# Allegro board LAY-96101_A.brd
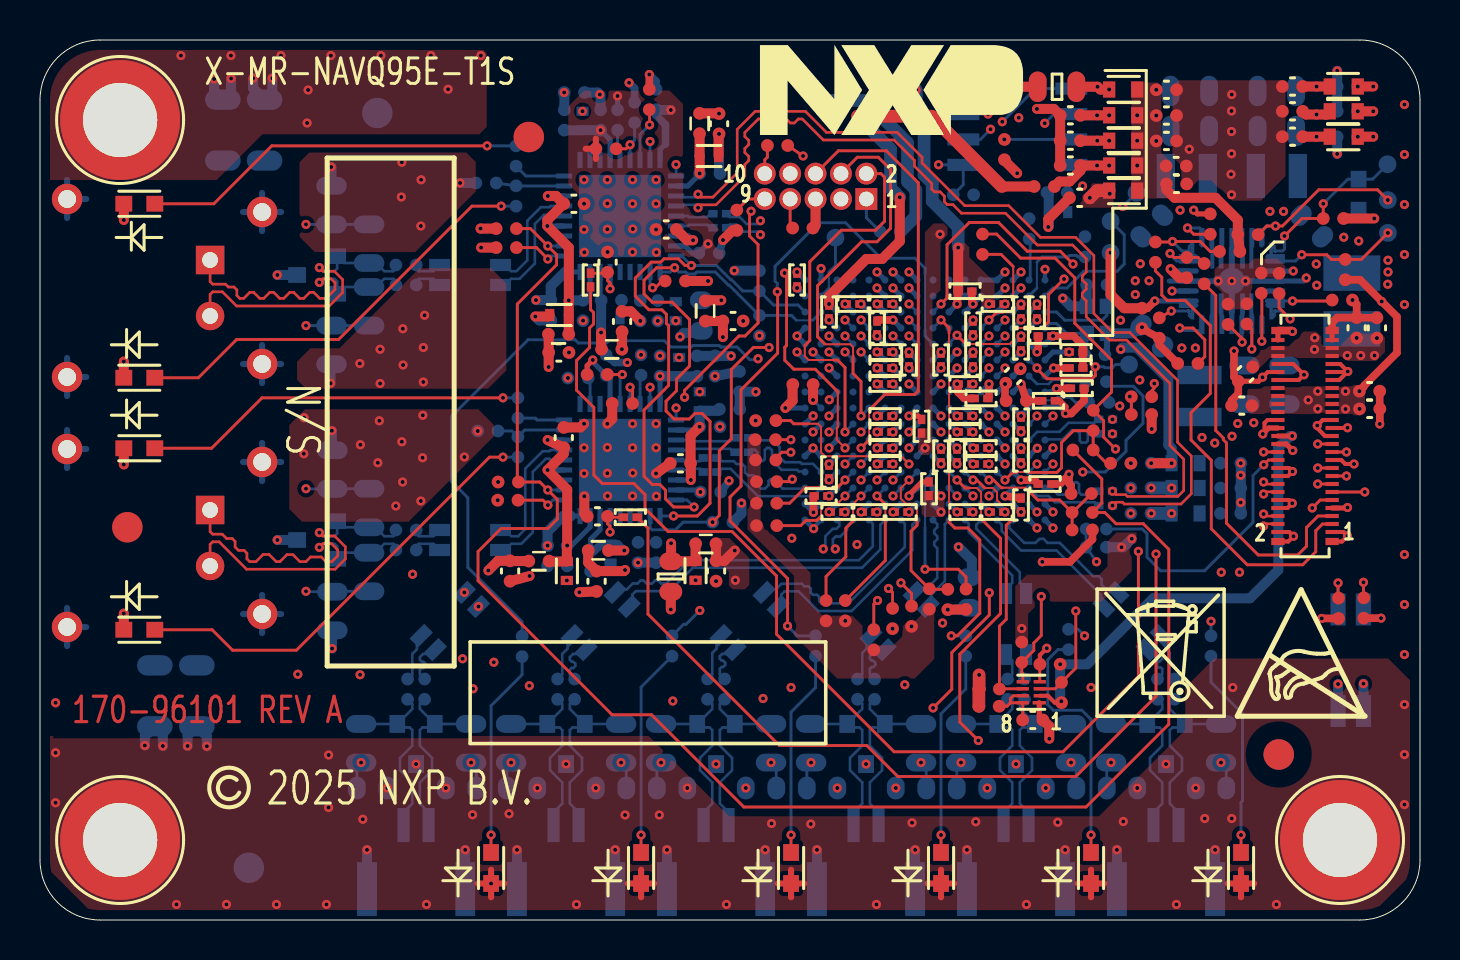
[diagram p0: board, top side]
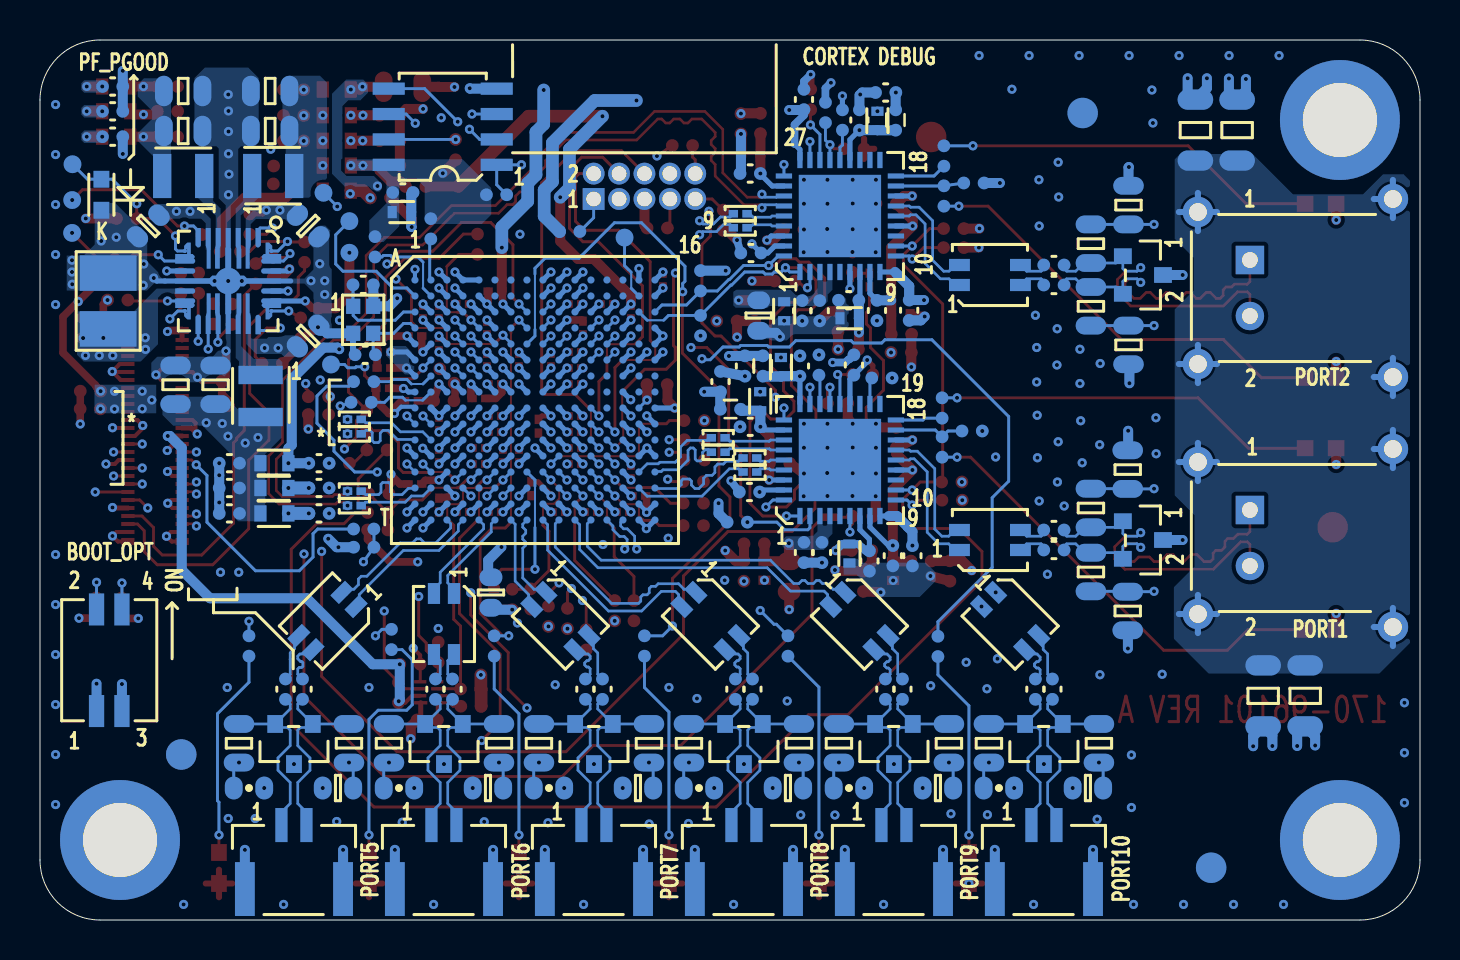
[diagram p1: board, bottom side, seen from below]

Outline 69.01 x 44 mm; copper layers: TOP, L2_GND1, L3_SIG1, L4_SIG2, L5_GND2, BOTTOM. Coordinates in mm from the lower left corner of the outline.
Outline path: 0,41 arc(0.88,43.12) 3,44 66.01,44 arc(68.13,43.12) 69.01,41 69.01,3 arc(68.13,0.88) 66.01,0 3,0 arc(0.88,0.88) 0,3 0,41

## Design rules (mm)
constraint set DEFAULT: min track width 0.145
net group DP1: nets TJA2_TRX_M TJA2_TRX_P
net group DP2: nets TJA2_TRX_CON_M TJA2_TRX_CON_P
net group DP3: nets TJA1_TRX_M TJA1_TRX_P
net group DP4: nets TJA1_TRX_CON_M TJA1_TRX_CON_P
net group DP5: nets SW_100BT1_TRX10_M SW_100BT1_TRX10_P
net group DP6: nets SW_100BT1_TRX9_M SW_100BT1_TRX9_P
net group DP7: nets SW_100BT1_TRX8_M SW_100BT1_TRX8_P
net group DP8: nets SW_100BT1_TRX7_M SW_100BT1_TRX7_P
net group DP9: nets SW_100BT1_TRX6_M SW_100BT1_TRX6_P
net group DP10: nets SW_100BT1_TRX5_M SW_100BT1_TRX5_P
net group DP11: nets N20074265 N20074296
net group DP12: nets N20256327 N20256378
net group ETH1: nets N20229809 N20245926
net group ETH2: nets N20074020 N20074039
net group ETH3: nets N20229760 N20229763
net group ETH4: nets N20064311 N20064322
net group ETH5: nets N20231645 N20231659
net group ETH_RX1: nets ETH_RX1_N ETH_RX1_P
net group ETH_RX2: nets ETH_RX2_N ETH_RX2_P
net group ETH_RX4: nets ETH_RX4_N ETH_RX4_P
net group ETH_TX1: nets ETH_TX1_N ETH_TX1_P
net group ETH_TX2: nets ETH_TX2_N ETH_TX2_P
net group ETH_TX4: nets ETH_TX4_N ETH_TX4_P
net group TRX_CON0: nets TRX_CON0_N TRX_CON0_P
net group TRX_CON0_C: nets TRX_CON0_C_N TRX_CON0_C_P
net group TRX_CON1: nets TRX_CON1_N TRX_CON1_P
net group TRX_CON1_C: nets TRX_CON1_C_N TRX_CON1_C_P
net group TRX_CON2: nets TRX_CON2_N TRX_CON2_P
net group TRX_CON2_C: nets TRX_CON2_C_N TRX_CON2_C_P
net group TRX_CON3: nets TRX_CON3_N TRX_CON3_P
net group TRX_CON3_C: nets TRX_CON3_C_N TRX_CON3_C_P
net group TRX_CON4: nets TRX_CON4_N TRX_CON4_P
net group TRX_CON4_C: nets TRX_CON4_C_N TRX_CON4_C_P
net group TRX_CON5: nets TRX_CON5_N TRX_CON5_P
net group TRX_CON5_C: nets TRX_CON5_C_N TRX_CON5_C_P
net group QSPI: nets QSPI_IO0 QSPI_IO1 QSPI_IO2 QSPI_IO3 QSPI_SCLK QSPI_SS_N
net group SPI: nets SPI4_PCS1 SPI4_PCS2 SPI4_SCK SPI4_SIN SPI4_SOUT

## Placement (name value [footprint] x y rotation side)
BH1  MH3.7_6  [MH236-146P]  4.01 40 0 top
BH2  MH3.7_6  [MH236-146P]  4.01 4 0 top
BH3  MH3.7_6  [MH236-146P]  65.01 4 0 top
C6  0.1uF  [CC0402_25]  49.64 10 0 top
C126  1uF  [CC0402_TOL0P2]  50.92 35.39 180 bottom
C127  0.1uF  [CC0402_25]  50.86 36.38 180 bottom
C134  0.1uF  [CC0402_25]  26.72 41.38 0 bottom
C137  0.1uF  [CC0402_25]  31.01 27.7 90 bottom
C138  1uF  [CC0402_TOL0P2]  32.99 25.94 90 bottom
C139  1uF  [CC0402_TOL0P2]  33.46 38.2 0 top
C140  0.1uF  [CC0402_25]  33.46 33.35 0 bottom
C141  4700pF  [CC0805_OV]  14.62 15.45 270 bottom
C146  0.1uF  [CC0402_25]  34.66 29.95 0 top
C149  0.1uF  [CC0402_25]  62.63 39.16 180 top
C150  1.0UF  [CC0402_25]  65.37 39.16 180 bottom
C151  10uF  [CC0603_OV]  31.54 17.18 270 top
C152  10uF  [CC0603_OV]  33.07 30.23 270 bottom
C153  0.1uF  [CC0402_25]  62.63 41.67 180 top
C154  1.0UF  [CC0402_25]  48.66 27.2 45 top
C155  1uF  [CC0402_TOL0P2]  31.79 30.44 270 bottom
C156  0.01uF  [CC0402_25]  27.87 20.18 180 top
C159  0.1uF  [CC0201]  37.86 32 90 top
C165  1uF  [CC0402_TOL0P2]  28.53 18.32 270 bottom
C167  1uF  [CC0402_TOL0P2]  28.53 30.09 0 bottom
C169  1.0UF  [CC0402_25]  65.37 41.67 180 bottom
C170  0.1uF  [CC0201]  47.87 30.8 0 top
C171  0.1uF  [CC0201]  40.66 30.8 180 top
C172  0.1uF  [CC0201]  46.26 31.44 0 top
C173  1uF  [CC0402_TOL0P2]  32.78 17.46 270 top
C174  0.1uF  [CC0201]  39.46 30.4 270 top
C175  0.1uF  [CC0201]  42.26 30.8 180 top
C176  0.1uF  [CC0201]  51.87 26.59 0 top
C177  0.1uF  [CC0201]  50.26 29.2 0 top
C178  0.1uF  [CC0402_25]  33.81 17.45 270 top
C179  0.1uF  [CC0201]  46.66 29.6 90 top
C180  0.1uF  [CC0201]  42.26 28.4 0 top
C181  0.1uF  [CC0201]  44.08 24.69 90 top
C182  0.1uF  [CC0201]  51.81 28.4 0 top
C183  0.1uF  [CC0201]  41.86 29.6 90 top
C184  0.1uF  [CC0201]  49.06 30.4 270 top
C186  0.1uF  [CC0201]  43.46 28 270 top
C187  0.1uF  [CC0201]  45.06 28 270 top
C188  0.1uF  [CC0201]  46.66 28 270 top
C191  0.1uF  [CC0201]  42.26 27.6 0 top
C192  0.1uF  [CC0201]  42.26 26.8 0 top
C193  0.1uF  [CC0201]  50.43 25.96 0 top
C194  0.1uF  [CC0201]  45.86 23.2 90 top
C195  0.1uF  [CC0201]  46.26 26.8 180 top
C196  0.1uF  [CC0201]  47.06 22.8 0 top
C201  0.1uF  [CC0201]  42.26 25.2 0 top
C202  10uF  [CC0603_OV]  46.46 16.38 270 bottom
C203  0.1uF  [CC0201]  46.26 25.2 180 top
C204  47uF  [CC0805_OV]  50.86 41.66 180 top
C205  0.1uF  [CC0201]  46.26 24.4 180 top
C206  0.1uF  [CC0201]  47.06 23.6 0 top
C207  0.1uF  [CC0201]  39.06 21.2 180 top
C211  0.1uF  [CC0201]  42.26 24.4 0 top
C212  0.1uF  [CC0201]  42.26 23.6 0 top
C213  0.1uF  [CC0201]  50.26 21.8 0 top
C217  0.1uF  [CC0201]  49.86 30.4 270 top
C218  0.1uF  [CC0201]  45.06 23.2 90 top
C219  0.1uF  [CC0201]  49.06 28.8 270 top
C220  0.1uF  [CC0402_25]  56.33 41.51 0 top
C221  0.1uF  [CC0201]  51.81 27.6 0 top
C222  0.1uF  [CC0201]  42.26 22.8 0 top
C223  0.1uF  [CC0201]  39.46 22.4 90 top
C226  0.1uF  [CC0201]  49.06 23.2 270 top
C230  0.1uF  [CC0201]  49.06 20.75 270 top
C231  0.1uF  [CC0201]  47.06 26.08 180 top
C232  0.1uF  [CC0201]  46.26 20.4 180 top
C233  0.1uF  [CC0201]  49.06 24.8 90 top
C234  0.1uF  [CC0201]  41.46 20.4 0 top
C235  0.1uF  [CC0201]  47.86 20.4 180 top
C236  0.1uF  [CC0201]  39.86 20.4 0 top
C237  0.1uF  [CC0201]  44.46 21.56 90 top
C238  0.1uF  [CC0201]  43.06 20.4 0 top
C375  4700pf  [CC0603_OV]  54.11 6.6 0 bottom
C376  0.1uF  [CC0402_25]  56.73 11.54 90 bottom
C378  0.1uF  [CC0402_25]  55.88 11.54 90 bottom
C388  4700pf  [CC0603_OV]  46.61 6.6 0 bottom
C389  0.1uF  [CC0402_25]  49.23 11.54 90 bottom
C392  0.1uF  [CC0402_25]  48.38 11.54 90 bottom
C398  22uF  [CC0805_OV]  57.5 39.45 0 bottom
C399  22uF  [CC0805_OV]  57.5 41.45 0 bottom
C401  4700pf  [CC0603_OV]  39.11 6.6 0 bottom
C402  0.1uF  [CC0402_25]  41.73 11.54 90 bottom
C403  22uF  [CC0805_OV]  60.23 26.76 90 bottom
C404  0.1uF  [CC0402_25]  40.88 11.54 90 bottom
C407  22uF  [CC0805_OV]  61.85 41.45 180 bottom
C408  22uF  [CC0805_OV]  61.85 39.45 180 bottom
C411  22uF  [CC0805_OV]  62.23 26.76 90 bottom
C422  4700pf  [CC0603_OV]  31.61 6.6 0 bottom
C423  0.1uF  [CC0402_25]  28.03 40 90 bottom
C424  0.1uF  [CC0402_25]  33.53 21.4 0 bottom
C425  0.1uF  [CC0402_25]  34.23 11.54 90 bottom
C426  0.1uF  [CC0402_25]  33.38 11.54 90 bottom
C430  1uF  [CC0402_TOL0P2]  27.13 39.96 90 bottom
C431  0.1uF  [CC0402_25]  33.76 27.7 270 bottom
C432  1uF  [CC0402_TOL0P2]  31.96 27.65 90 bottom
C434  0.1uF  [CC0402_25]  31.31 34.52 180 top
C435  0.1uF  [CC0402_25]  32.02 22.83 180 top
C439  1uF  [CC0402_TOL0P2]  25.96 30.25 180 top
C441  1uF  [CC0402_TOL0P2]  26.35 17.45 270 top
C444  0.1uF  [CC0402_25]  26.7 35.81 0 top
C445  0.1uF  [CC0402_25]  26.19 24.12 90 top
C446  0.1uF  [CC0402_25]  18.31 18.5 180 bottom
C447  0.1uF  [CC0402_25]  18.31 19.5 180 bottom
C448  0.1uF  [CC0402_25]  33.49 37.33 0 bottom
C449  0.1uF  [CC0402_25]  33.49 24.66 0 bottom
C450  0.1uF  [CC0402_25]  30.81 41.02 90 bottom
C451  0.1uF  [CC0402_25]  28.31 27.75 90 bottom
C452  8PF  [CC0402_25]  52.85 31.76 180 bottom
C454  0.1uF  [CC0402_25]  30.89 30.46 270 bottom
C455  0.1uF  [CC0402_25]  30.02 30.46 270 bottom
C456  0.01uF  [CC0402_25]  28.38 32.89 90 top
C457  0.1uF  [CC0402_25]  28.57 30.99 0 bottom
C458  0.1uF  [CC0402_25]  27.16 30.48 270 bottom
C459  0.1uF  [CC0402_25]  25.54 30.49 270 bottom
C460  0.1uF  [CC0402_25]  27.53 17.95 270 bottom
C461  0.1uF  [CC0402_25]  26.36 18.21 270 bottom
C462  0.1uF  [CC0402_25]  25.38 18.21 270 bottom
C463  0.1uF  [CC0402_25]  30.81 18.38 270 bottom
C464  0.1uF  [CC0402_25]  29.91 18.38 270 bottom
C466  4700pf  [CC0603_OV]  24.11 6.6 0 bottom
C467  0.1uF  [CC0402_25]  26.73 11.54 90 bottom
C468  8PF  [CC0402_25]  52.74 28.26 0 bottom
C469  0.1uF  [CC0402_25]  25.88 11.54 90 bottom
C470  1.0UF  [CC0402_25]  55.06 22.84 180 bottom
C471  0.1uF  [CC0402_25]  59.54 22.84 0 bottom
C472  0.1uF  [CC0201]  53.29 25.03 180 bottom
C474  0.1uF  [CC0201]  53.29 24.31 180 bottom
C475  4700pf  [CC0603_OV]  16.61 6.6 0 bottom
C477  0.1uF  [CC0402_25]  19.23 11.54 90 bottom
C479  0.1uF  [CC0402_25]  18.38 11.54 90 bottom
C481  0.1uF  [CC0201]  33.51 23.1 0 bottom
C482  0.1uF  [CC0201]  33.51 22.4 0 bottom
C483  1.0UF  [CC0402_25]  51.52 38.97 180 top
C484  1.0UF  [CC0402_25]  51.52 37.73 180 top
C485  1.0UF  [CC0402_25]  51.52 40.23 180 top
C486  1.0UF  [CC0402_25]  55.06 20.33 180 bottom
C487  1.0UF  [CC0402_25]  55.06 21.6 180 bottom
C488  0.1uF  [CC0402_25]  56.33 38.95 0 top
C489  0.1uF  [CC0402_25]  56.33 40.22 0 top
C490  0.1uF  [CC0402_25]  56.81 37.7 0 top
C491  0.1uF  [CC0402_25]  59.54 20.33 0 bottom
C492  0.1uF  [CC0402_25]  59.54 21.6 0 bottom
C493  4.7uF  [CC0603_OV]  63.6 34.7 315 bottom
C494  22uF  [CC1210]  65.6 30.95 90 bottom
C495  4.7uF  [CC0603_OV]  55.6 29.2 135 bottom
C496  4.7uF  [CC0603_OV]  55.6 34.7 225 bottom
C497  0.1uF  [CC0201]  53.29 21.44 180 bottom
C498  0.1uF  [CC0201]  53.29 20.72 180 bottom
C499  0.1uF  [CC0201]  35.09 23.39 0 bottom
C500  0.1uF  [CC0201]  35.09 24.11 0 bottom
C501  0.1uF  [CC0201]  33.99 34.61 0 bottom
C502  0.1uF  [CC0201]  33.99 35.31 0 bottom
C503  0.1uF  [CC0402_25]  18.31 31.75 180 bottom
C504  0.1uF  [CC0402_25]  18.31 32.75 180 bottom
C505  4700pF  [CC0805_OV]  14.58 28.75 270 bottom
C506  0.1uF  [CC0402_25]  34.98 26.92 90 bottom
C507  0.1uF  [CC0402_25]  23.51 17.45 270 top
C508  0.1uF  [CC0402_25]  27.83 16.94 270 top
C509  0.1uF  [CC0402_25]  33.96 39.81 270 top
C510  0.1uF  [CC0402_25]  29.11 29.93 90 top
C511  0.1uF  [CC0402_25]  25.94 28.38 0 top
C512  0.1uF  [CC0201]  27.53 32 270 top
C513  0.1uF  [CC0201]  29.52 20.14 0 top
C514  0.1uF  [CC0402_25]  62.63 40.44 180 top
C515  1.0UF  [CC0402_25]  65.37 40.44 180 bottom
C516  1000pF  [CC1206_OV]  7.84 11.21 270 bottom
C517  1000pF  [CC1206_OV]  9.14 39.49 90 bottom
C521  1uF  [CC0402_25]  66.85 29.6 90 top
C524  0.1uF  [CC0402_25]  65.84 29.61 90 top
C525  1uF  [CC0402_25]  66.49 25.55 0 top
C526  0.1uF  [CC0402_25]  66.48 26.44 0 top
C527  0.1uF  [CC0402_25]  60.28 27.3 225 top
C528  0.1uF  [CC0402_25]  60.09 25.72 180 top
C529  0.1uF  [CC0402_25]  56.83 36.8 0 top
C530  1.0UF  [CC0402_25]  51.99 36.11 180 top
D33  LED_AMB  [LED_0603]  4.97 14.51 180 top
D34  LED_GRN  [LED_0603]  4.97 23.59 180 top
D35  LED_AMB  [LED_0603]  4.97 27.11 180 top
D36  LED_GRN  [LED_0603]  4.97 35.81 180 top
D66  PESD2ETH1G-T  [SOT23_A]  56.31 8.8 0 bottom
D67  LED GREEN  [LED_0603]  60.06 2.6 270 top
D68  PESD2ETH1G-T  [SOT23_A]  48.81 8.8 0 bottom
D69  LED GREEN  [LED_0603]  52.56 2.6 270 top
D70  PESD2ETH1G-T  [SOT23_A]  41.31 8.8 0 bottom
D71  LED GREEN  [LED_0603]  45.06 2.6 270 top
D72  PESD2ETH1G-T  [SOT23_A]  33.81 8.8 0 bottom
D73  LED GREEN  [LED_0603]  37.56 2.6 270 top
D74  PESD2ETH1G-T  [SOT23_A]  26.31 8.8 0 bottom
D75  LED GREEN  [LED_0603]  30.06 2.6 270 top
D76  PESD2ETH1G-T  [SOT23_A]  18.81 8.8 0 bottom
D77  LED GREEN  [LED_0603]  22.56 2.6 270 top
D79  LED_GRN  [LED_0603]  65.94 36.27 270 bottom
J26  SM02B-GHS-TB(LF)(SN)  [CON_1X2_1P25_5P8X4P1_SM_RA]  56.31 2.5 180 bottom
J27  SM02B-GHS-TB(LF)(SN)  [CON_1X2_1P25_5P8X4P1_SM_RA]  48.81 2.5 180 bottom
J28  SM02B-GHS-TB(LF)(SN)  [CON_1X2_1P25_5P8X4P1_SM_RA]  41.31 2.5 180 bottom
J29  SM02B-GHS-TB(LF)(SN)  [CON_1X2_1P25_5P8X4P1_SM_RA]  33.81 2.5 180 bottom
J30  SM02B-GHS-TB(LF)(SN)  [CON_1X2_1P25_5P8X4P1_SM_RA]  26.31 2.5 180 bottom
J31  SM02B-GHS-TB(LF)(SN)  [CON_1X2_1P25_5P8X4P1_SM_RA]  18.81 2.5 180 bottom
J32  CON JACK  [CON2_2P8_JACK_TH]  8.51 20.5 90 bottom
J33  CON PLUG 2X25  [CON50_0P4_11P72X2P05_SM_A]  63.26 24.2 90 top
J35  CON JACK  [CON2_2P8_JACK_TH]  8.51 33 90 bottom
J37  SHF-105-01-L-D-RA  [CON2X5_50_TH_RA]  41.32 36.05 180 bottom
L13  120  [IND_0402]  32.98 39.83 270 top
L14  120  [IND_0402]  33.27 30.45 90 top
L15  120  [IND_0402]  34.48 25.54 180 bottom
L16  330 OHM  [IND_1608]  65.19 39.16 0 top
L17  330 OHM  [IND_1608]  65.19 41.67 0 top
L18  120  [IND_0402]  27.92 18.48 0 top
L19  120  [IND_0402]  28.59 28.54 180 top
L21  120  [IND_0402]  33.29 18.81 180 top
L23  330 OHM  [IND_1608]  54.16 41.52 180 top
L35  200uH @ 100KHz  [IND_ACT1210_SM]  54.63 14.95 315 bottom
L37  200uH @ 100KHz  [IND_ACT1210_SM]  48.81 14.8 270 bottom
L39  200uH @ 100KHz  [IND_ACT1210_SM]  42.98 14.95 225 bottom
L40  200uH @ 100KHz  [IND_ACT1210_SM]  35.48 14.95 225 bottom
L41  120  [IND_0402]  26.22 40 90 bottom
L42  120  [IND_0402]  32.86 27.7 90 bottom
L44  120  [IND_0402]  25.93 29.29 180 top
L45  DLW32MH101XT2  [IND_3P4X2P7_SMT]  21.51 19 180 bottom
L46  120  [IND_0402]  24.95 17.95 180 top
L47  200uH @ 100KHz  [IND_ACT1210_SM]  28.03 14.95 225 bottom
L48  330 OHM  [IND_1608]  57.29 22.84 180 bottom
L49  200uH @ 100KHz  [IND_ACT1210_SM]  20.49 14.95 225 bottom
L50  330 OHM  [IND_1608]  54.16 38.97 180 top
L51  330 OHM  [IND_1608]  54.16 37.73 180 top
L52  330 OHM  [IND_1608]  54.16 40.23 180 top
L53  330 OHM  [IND_1608]  57.29 20.33 180 bottom
L54  330 OHM  [IND_1608]  57.29 21.6 180 bottom
L55  DLW32MH101XT2  [IND_3P4X2P7_SMT]  21.51 32.25 180 bottom
L56  330 OHM  [IND_1608]  65.19 40.44 0 top
L57  330 OHM  [IND_1608]  54.16 36.47 180 top
LBK1  0.47 uH  [IND2520]  57.35 37.2 180 bottom
LBK2  0.47 uH  [IND2520]  57.98 26.2 270 bottom
LBK3  0.47 uH  [IND2520]  61.85 37.2 0 bottom
NOREF  -  []  47.46 13.1 0 top
NOREF#2  -  []  57.35 29.7 0 top
NOREF#3  -  []  61.85 29.7 90 top
NOREF#4  -  []  23.85 1.55 0 top
NOREF#5  -  []  36.01 39.25 0 top
NOREF#6  -  []  32.64 25.34 90 top
NOREF#7  -  []  50.16 13.1 90 top
NOREF#8  -  []  38.26 20 90 top
NOREF#9  -  []  56.06 14.22 90 top
NOREF#10  -  []  50.44 35.39 0 top
NOREF#11  -  []  61.9 19.4 90 top
NOREF#12  -  []  58.02 32.61 0 top
NOREF#13  -  []  52.35 29.34 0 top
NOREF#14  -  []  9.45 6.6 0 top
NOREF#15  -  []  31.96 27.18 90 top
NOREF#16  -  []  28.53 17.85 90 top
NOREF#17  -  []  56.83 24.8 0 top
NOREF#18  -  []  32.98 38.2 0 top
NOREF#19  -  []  36.24 36.05 0 top
NOREF#20  -  []  8.51 17.7 90 top
NOREF#21  -  []  57.95 31.53 0 top
NOREF#22  -  []  57.43 30.45 0 top
NOREF#23  -  []  26.35 16.98 90 top
NOREF#24  -  []  26 16.85 90 top
NOREF#25  -  []  28.06 30.09 0 top
NOREF#26  -  []  38.26 20 0 top
NOREF#27  -  [unnamed#2]  4.37 19.64 0 top
NOREF#28  -  []  33.32 14.7 0 top
NOREF#29  -  []  49.07 12.06 0 top
NOREF#30  -  []  49.14 11.91 0 top
NOREF#31  -  []  -3.64 35.1 0 top
NOREF#32  -  []  30.91 0.45 90 top
NOREF#33  -  []  8.51 20.5 90 top
NOREF#34  -  []  27.78 12.79 90 top
NOREF#35  -  []  31.61 28.25 0 top
NOREF#36  -  []  30.91 0.45 0 top
NOREF#37  -  []  57.99 32.1 0 top
NOREF#38  -  []  38.85 1.55 0 top
NOREF#39  -  []  25.87 14.7 0 top
NOREF#40  -  []  26.78 39.36 90 top
NOREF#41  -  []  53.35 29.34 90 top
NOREF#42  -  []  23.41 0.45 0 top
NOREF#43  -  []  61.76 30.45 90 top
NOREF#44  -  []  32.43 16.86 0 top
NOREF#45  -  []  38.41 0.45 0 top
NOREF#46  -  []  -3.64 22.6 0 top
NOREF#47  -  []  57.95 32.37 0 top
NOREF#48  -  []  26.78 40.56 0 top
NOREF#49  -  []  11.11 27.8 90 top
NOREF#50  -  []  6.87 40.9 0 top
NOREF#51  -  []  22.71 30.7 0 top
NOREF#52  -  []  31.35 1.55 0 top
NOREF#53  -  []  50.32 35.05 90 top
NOREF#54  -  []  58.1 29.77 90 top
NOREF#55  -  []  35.23 12.79 90 top
NOREF#56  -  []  53.41 0.45 0 top
NOREF#57  -  []  19.98 31.75 0 top
NOREF#58  -  []  58.02 31.3 0 top
NOREF#59  -  []  39.29 8.82 0 top
NOREF#60  -  []  58 30.88 0 top
NOREF#61  -  []  24.96 34.1 0 top
NOREF#62  -  []  55.36 13.52 0 top
NOREF#63  -  []  27.93 30.44 0 top
NOREF#64  -  []  58.1 29.77 90 top
NOREF#65  -  []  28.88 17.73 90 top
NOREF#66  -  []  1.36 27.15 90 top
NOREF#67  -  [unnamed#2]  61.94 8.28 0 top
NOREF#68  -  []  59.6 31.95 0 top
NOREF#69  -  []  8.51 20.5 90 top
NOREF#70  -  []  38.41 0.45 90 top
NOREF#71  -  []  26 16.85 0 top
NOREF#72  -  []  4.01 4 0 top
NOREF#73  -  []  20.25 12.79 90 top
NOREF#74  -  []  59.6 31.95 0 top
NOREF#75  -  []  -3.64 28.1 90 top
NOREF#76  -  []  57.99 31.8 0 top
NOREF#77  -  []  53.7 28.96 90 top
NOREF#78  -  []  8.51 33 90 top
NOREF#79  -  []  32.37 38.54 90 top
NOREF#80  -  []  32.43 16.86 90 top
NOREF#81  -  []  49.14 10.86 0 top
NOREF#82  -  []  54.88 12.79 0 top
NOREF#83  -  []  48.31 13.27 0 top
NOREF#84  -  []  34.06 37.85 90 top
NOREF#85  -  []  6.87 4.9 0 top
NOREF#86  -  []  8.51 30.2 90 top
NOREF#87  -  []  1.36 14.65 90 top
NOREF#88  -  []  29.13 29.74 90 top
NOREF#89  -  []  67.87 4.9 0 top
NOREF#90  -  []  37.26 19 0 top
NOREF#91  -  []  61.1 29.79 90 top
NOREF#92  -  []  41.55 14.22 0 top
NOREF#93  -  []  -441.94 233.39 0 top
NOREF#94  -  []  19.98 31.75 90 top
NOREF#95  -  []  60.8 37.2 0 top
NOREF#96  -  []  25.36 29.9 90 top
NOREF#97  -  []  60.45 38.35 0 top
NOREF#98  -  []  32.14 29.84 90 top
NOREF#99  -  []  45.91 0.45 0 top
NOREF#100  -  []  16.35 1.55 0 top
NOREF#101  -  []  38.26 20 0 top
NOREF#102  -  []  63.34 10.14 90 top
NOREF#103  -  []  37.26 19 90 top
NOREF#104  -  []  31.79 29.96 90 top
NOREF#105  -  [unnamed#2]  24.44 39.15 0 top
NOREF#106  -  []  63.34 15.84 0 top
NOREF#107  -  []  34.05 14.22 0 top
NOREF#108  -  []  27.13 39.49 90 top
NOREF#109  -  []  63.25 36.05 90 top
NOREF#110  -  []  19.77 13.52 90 top
NOREF#111  -  []  -45.58 -91.35 0 top
NOREF#112  -  []  38.26 20 90 top
NOREF#113  -  []  27.31 13.52 90 top
NOREF#114  -  []  50.32 35.05 0 top
NOREF#115  -  []  21.51 8.82 0 top
NOREF#116  -  []  57.39 0 90 top
NOREF#117  -  []  36.24 37.32 90 top
NOREF#118  -  []  25.49 30.25 0 top
NOREF#119  -  []  34.76 13.52 90 top
NOREF#120  -  []  19.06 14.22 0 top
NOREF#121  -  []  52 28.96 0 top
NOREF#122  -  []  56.3 37.2 0 top
NOREF#123  -  []  32.99 25.46 90 top
NOREF#124  -  []  32.64 26.54 0 top
NOREF#125  -  []  55.95 36.05 90 top
NOREF#126  -  []  31.44 29.84 0 top
NOREF#127  -  []  53.41 0.45 90 top
NOREF#128  -  []  11.11 15.3 90 top
NOREF#129  -  []  64.28 18.34 90 top
NOREF#130  -  []  15.91 0.45 0 top
NOREF#131  -  []  26.6 14.22 0 top
NOREF#132  -  []  57.98 25.15 90 top
NOREF#133  -  []  31.61 27.05 90 top
NOREF#134  -  []  42.26 13.52 90 top
NOREF#135  -  []  40.05 36.05 0 top
NOREF#136  -  []  8.51 33 90 top
NOREF#137  -  []  32.37 38.54 0 top
NOREF#138  -  []  56.95 32.83 0 top
NOREF#139  -  []  32.78 16.99 90 top
NOREF#140  -  []  28.18 17.73 0 top
NOREF#141  -  []  61.9 29.48 0 top
NOREF#142  -  []  15.91 0.45 90 top
NOREF#143  -  []  55.95 36.05 0 top
NOREF#144  -  []  19.98 18.5 90 top
NOREF#145  -  []  49.31 13.27 90 top
NOREF#146  -  []  62.23 30.06 0 top
NOREF#147  -  []  56.95 31.07 0 top
NOREF#148  -  []  19.98 18.5 0 top
NOREF#149  -  []  0 24.53 0 top
NOREF#150  -  []  23.41 0.45 90 top
NOREF#151  -  []  45.91 0.45 90 top
NOREF#152  -  []  52.86 10.19 0 top
NOREF#153  -  []  59.88 10.19 0 top
NOREF#154  -  []  32.86 37.85 0 top
NOREF#155  -  []  18.34 14.7 0 top
NOREF#156  -  []  19.81 17.65 0 top
NOREF#157  -  []  -3.64 15.6 90 top
NOREF#158  -  []  19.81 17.65 90 top
NOREF#159  -  []  -467.22 -286.29 0 top
NOREF#160  -  []  64.91 10.45 0 top
NOREF#161  -  []  53.85 1.55 0 top
NOREF#162  -  []  20.71 12.7 90 top
NOREF#163  -  []  49.14 11.56 90 top
NOREF#164  -  []  25.36 30.6 0 top
NOREF#165  -  []  56.79 14.7 90 top
NOREF#166  -  []  49.07 10.71 90 top
NOREF#167  -  []  58 33.02 0 top
NOREF#168  -  []  40.82 14.7 0 top
NOREF#169  -  []  42.73 12.79 90 top
NOREF#170  -  []  59.13 24.8 90 top
NOREF#171  -  []  46.35 1.55 0 top
NOREF#172  -  [unnamed#2]  10.44 2.61 180 bottom
NOREF#173  -  [unnamed#2]  61.94 8.28 180 bottom
NOREF#174  -  [unnamed#2]  16.87 40.35 180 bottom
R5  200K  [RC0402_25]  47.46 10.69 0 top
R93  100K  [RC0402_25]  55.1 30.08 270 top
R160  100K  [RC0402_25]  55.97 29.6 270 top
R170  4.7K  [RC0402_25]  48.23 38.52 90 top
R171  1.2K  [RC0402_25]  64.68 35.08 180 top
R173  4.7K  [RC0402_25]  46.18 36.26 180 bottom
R184  100 K  [RC0805_OV]  14.62 22.52 90 bottom
R186  1.0K  [RC0805_OV]  16.46 20.6 90 bottom
R187  1.0K  [RC0805_OV]  16.46 17.4 270 bottom
R191  10K  [RC0402_25]  52.82 18.64 180 bottom
R193  10K  [RC0402_25]  49.46 34.56 270 bottom
R194  10K  [RC0402_25]  52.25 33.66 270 bottom
R195  10K  [RC0402_25]  55.08 25.27 180 top
R200  10K  [RC0402_25]  34.14 19.89 180 bottom
R208  6.49K  [RC0402_25]  38.15 26.77 180 top
R209  10K  [RC0402_25]  46.31 16.04 270 top
R211  0  [RC0402_25]  48.82 25.96 180 top
R213  10K  [RC0402_25]  36.34 21.92 0 top
R215  10K  [RC0402_25]  36.34 20.84 0 top
R216  10K  [RC0402_25]  42.63 15.07 270 top
R218  10K  [RC0402_25]  36.28 24.02 0 top
R220  10K  [RC0402_25]  36.34 19.72 0 top
R222  10K  [RC0402_25]  36.29 23 0 top
R223  10K  [RC0402_25]  39.31 15.46 90 top
R224  10K  [RC0402_25]  40.27 15.46 90 top
R225  10K  [RC0402_25]  41.69 14.01 90 top
R226  10K  [RC0402_25]  43.58 15.19 90 top
R227  10K  [RC0402_25]  45.39 16.02 270 top
R228  10K  [RC0402_25]  36.29 24.97 180 top
R229  4.7K  [RC0402_25]  66.19 15.6 270 top
R230  4.7K  [RC0402_25]  64.93 15.59 270 top
R231  680  [RC0402_25]  23.9 23.65 270 bottom
R232  680  [RC0402_25]  23.9 25.6 90 bottom
R233  680  [RC0402_25]  23.81 36.2 270 bottom
R234  680  [RC0402_25]  23.81 38.2 90 bottom
R454  1.0K  [RC0805_OV]  59.06 8.84 270 bottom
R459  100K  [RC0603_OV]  58.56 6.6 180 bottom
R462  1.0K  [RC0805_OV]  53.56 8.84 270 bottom
R464  240  [RC0402_25]  58.56 13.7 270 bottom
R465  1.0K  [RC0805_OV]  51.56 8.84 270 bottom
R466  100K  [RC0603_OV]  51.06 6.6 180 bottom
R470  1.0K  [RC0805_OV]  46.06 8.84 270 bottom
R473  240  [RC0402_25]  51.43 14.03 270 bottom
R481  1.0K  [RC0805_OV]  44.06 8.84 270 bottom
R489  100K  [RC0603_OV]  43.56 6.6 180 bottom
R490  1.0K  [RC0805_OV]  38.56 8.84 270 bottom
R493  240  [RC0402_25]  46.29 13.7 270 bottom
R501  1.0K  [RC0805_OV]  36.56 8.84 270 bottom
R504  10K  [RC0402_25]  30.47 41.02 90 top
R505  10K  [RC0402_25]  29.73 40.38 90 bottom
R506  10K  [RC0402_25]  28.31 38.56 0 top
R507  10K  [RC0402_25]  28.88 40 90 bottom
R508  10K  [RC0402_25]  30.06 27.75 90 bottom
R509  10K  [RC0402_25]  29.12 25.83 180 top
R511  10K  [RC0402_25]  27.87 27.27 180 top
R512  10K  [RC0402_25]  26.91 27.1 180 bottom
R515  100K  [RC0603_OV]  36.06 6.6 180 bottom
R517  1.0K  [RC0805_OV]  31.06 8.84 270 bottom
R518  10K  [RC0402_25]  22.31 36.85 180 bottom
R519  10K  [RC0402_25]  22.4 24.45 180 bottom
R520  240  [RC0402_25]  38.78 13.7 270 bottom
R531  10K  [RC0402_25]  31.77 31.95 180 top
R532  1.0K  [RC0805_OV]  29.06 8.84 270 bottom
R535  100K  [RC0603_OV]  28.56 6.6 180 bottom
R536  1.0K  [RC0805_OV]  23.56 8.84 270 bottom
R537  240  [RC0402_25]  31.61 13.7 270 bottom
R538  1.0K  [RC0805_OV]  21.56 8.84 270 bottom
R539  100K  [RC0603_OV]  21.06 6.6 180 bottom
R540  1.0K  [RC0805_OV]  16.06 8.84 270 bottom
R541  240  [RC0402_25]  24.11 13.68 270 bottom
R545  10K  [RC0402_25]  23.42 21.9 180 top
R546  10K  [RC0402_25]  23.32 34.57 180 top
R547  10K  [RC0402_25]  23.32 33.62 0 top
R548  10K  [RC0402_25]  23.4 20.99 0 top
R549  0  [RC0402_25]  52.12 20.38 0 top
R550  10K  [RC0402_25]  52.07 21.32 180 top
R551  0  [RC0402_25]  52.16 23.5 0 top
R552  0  [RC0402_25]  52.67 24.98 270 top
R553  10K  [RC0402_25]  54.04 22.84 0 top
R554  10K  [RC0402_25]  52.12 19.5 180 top
R555  10K  [RC0402_25]  44.47 16.05 90 top
R558  100  [RC0402_25]  42.52 34.42 180 bottom
R559  1.0K  [RC0805_OV]  16.46 30.68 270 bottom
R560  1.0K  [RC0805_OV]  16.46 33.82 90 bottom
R561  100 K  [RC0805_OV]  14.58 35.75 90 bottom
R562  0  [RC0402_25]  52.82 19.55 180 bottom
R563  0  [RC0402_25]  55.08 26.16 180 top
R564  5.1K  [RC0402_25]  60.41 34.27 0 top
R565  100K  [RC0402_25]  65.27 32.52 90 top
R566  5.1K  [RC0402_25]  58.52 34.8 270 top
R567  0  [RC0402_25]  65.12 31 180 top
R568  0  [RC0402_25]  60.35 30.3 90 top
R569  0  [RC0402_25]  59.41 30.29 270 top
R571  0  [RC0402_25]  58.21 32.31 270 top
R572  0  [RC0402_25]  55.78 33.39 270 top
R573  1.5K  [RC0402_25]  35.98 31.96 270 bottom
R574  1.5K  [RC0402_25]  35.98 29.72 90 bottom
R577  0  [RC0402_25]  38.14 34.6 0 top
R578  0  [RC0402_25]  34.84 34.99 270 top
R579  0  [RC0402_25]  36.88 38.73 180 top
R580  0  [RC0402_25]  47.13 33.79 90 top
R581  2.21k  [RC0402_25]  59.49 33.42 180 top
R582  2.21k  [RC0402_25]  57.35 32.62 90 top
R584  0  [RC0402_25]  61.96 31.83 270 top
R585  0  [RC0402_25]  61.07 31.84 270 top
R586  0  [RC0402_25]  57.4 27.83 0 top
R587  0  [RC0402_25]  52.82 26.92 180 bottom
R588  0  [RC0402_25]  52.94 25.88 180 bottom
R589  0  [RC0402_25]  50.22 36.67 180 top
R590  1M  [RC1206_OV]  5.74 11.21 270 bottom
R591  1M  [RC1206_OV]  11.23 39.49 90 bottom
R593  1.5K  [RC0402_25]  47.47 11.55 0 top
R594  1.5K  [RC0402_25]  49.09 13.39 270 top
R595  1.5K  [RC0402_25]  50.51 12.79 180 top
R596  1.5K  [RC0402_25]  51.08 11.38 90 top
S1  CHS-02TA  [SW4_DIP_1P27_4P4X5P7]  65.54 12.99 90 bottom
TP21  TP_35MIL  [TESTPOINT_35MIL]  39.78 34.12 180 bottom
TP22  TP_35MIL  [TESTPOINT_35MIL]  54.46 27.77 180 bottom
TP245  TP_35MIL  [TESTPOINT_35MIL]  53.53 33.36 270 bottom
TP248  TP_35MIL  [TESTPOINT_35MIL]  54.83 36.36 180 bottom
TP249  TP_35MIL  [TESTPOINT_35MIL]  67.4 36 270 bottom
TP250  TP_35MIL  [TESTPOINT_35MIL]  67.4 34.36 270 bottom
TP251  TP_35MIL  [TESTPOINT_35MIL]  53.54 34.94 180 bottom
TP252  TP_35MIL  [TESTPOINT_35MIL]  67.38 37.79 270 bottom
U53  IS25LP080D-JNLE  [SO8_1P27_4X5]  48.87 39.66 0 bottom
U54  TJA1120BHN  [QFN36_0P5_6X6]  29.01 35.2 90 bottom
U55  TJA1120BHN  [QFN36_0P5_6X6]  29.01 23 90 bottom
U57  PESD2ETH1G-T  [SOT23_A]  13.86 19 270 bottom
U58  SJA1110AEL  [BGA256_0P8_14X14MM_059H]  44.26 26 180 bottom
U63  PPF5103AMMAFES  [SOT2089-1_FCQFN28_0P5_4P5SQ]  59.6 31.95 270 bottom
U64  PESD2ETH1G-T  [SOT23_A]  13.86 32.25 270 bottom
U65  PCA9306JK  [X2SON8_0P35_1X1P35MM]  49.57 11.39 180 top
X1  25MHz  [XTL4_2P1X1P7MM_SM]  52.85 30.01 270 bottom

## Library data of the parts
BH1-BH3 = MOUNT_HOLE
C6 C126 C127 C134 C137-C141 C146 C150-C152 C154-C156 C165 C167 C169 C173 C178 C202 C204 C375 C376 C378 C388 C389 C392 C398 C399 C401-C404 C407 C408 C411 C422-C426 C430-C432 C434 C435 C439 C441 C444-C452 C454-C464 C466-C470 C475 C477 C479 C483-C487 C493-C496 C503-C511 C515-C517 C521 C525 C530 = CAP_NP
C149 C153 C220 C471 C488-C492 C514 C524 C526-C529 = CAP_NP: tolerance: 10%
C159 C170-C172 C174-C177 C179-C184 C186-C188 C191-C196 C201 C203 C205-C207 C211-C213 C217-C219 C221-C223 C226 C230-C238 C472 C474 C497-C500 = CAP_NP: Tolerance: TOLERANCE; User Part Number: 150-80124
C481 C482 C501 C502 C512 C513 = CAP_NP: Tolerance: TOLERANCE; User Part Number: 150-80340
D33-D36 D67 D69 D71 D73 D75 D77 D79 = LED
D66 D68 D70 D72 D74 D76 U57 U64 = ESD_DIODE_2LINE
J26-J31 = CONN_2X1_SH
J32 J35 = CONN_JACK_2P_4SH
J33 = HDR_2X25_4S
J37 = CONN_HDR_5X2
L13-L15 L18 L19 L21 L41 L42 L44 L46 = INDUCTOR_FERRITE
L16 L17 L23 L48 L50-L54 L56 L57 = BEAD
L35 L37 L39 L40 L47 L49 = FILTER_4P
L45 L55 = DLW43
LBK1-LBK3 = INDUCTOR
R5 R93 R160 R170 R171 R173 R191 R193-R195 R200 R208 R209 R211 R213 R215 R216 R218 R220 R222-R234 R454 R459 R462 R464-R466 R470 R473 R481 R489 R490 R493 R501 R504-R509 R511 R512 R515 R517-R520 R531 R532 R535-R541 R545-R555 R558 R562-R569 R571-R574 R577-R582 R584-R591 R593-R596 = RES
R184 R186 R187 R559-R561 = RES: tolerance: 1%
S1 = CHS-02TA_SW
TP21 TP22 TP245 TP248-TP252 = T POINT R: Tolerance: TOLERANCE; User Part Number: 510-75618
U53 = 25WP_8P
U54 U55 = TJA1120BHN_HVQFN36P
U58 = SJA1110_BGA256_B
U63 = PF5103_QFN28
U65 = PCA9306_TSSOP8
X1 = XTAL_13

## Footprints (pads in the part's own frame, mm; a bottom-side part is the same pattern mirrored in y, then rotated)
BGA256_0P8_14X14MM_059H
  round 0.356 smd: A1(-6,6) A2(-5.2,6) A3(-4.4,6) A4(-3.6,6) A5(-2.8,6) A6(-2,6) A7(-1.2,6) A8(-0.4,6) A9(0.4,6) A10(1.2,6) A11(2,6) A12(2.8,6) A13(3.6,6) A14(4.4,6) A15(5.2,6) A16(6,6) B1(-6,5.2) B2(-5.2,5.2) B3(-4.4,5.2) B4(-3.6,5.2) B5(-2.8,5.2) B6(-2,5.2) B7(-1.2,5.2) B8(-0.4,5.2) B9(0.4,5.2) B10(1.2,5.2) B11(2,5.2) B12(2.8,5.2) B13(3.6,5.2) B14(4.4,5.2) B15(5.2,5.2) B16(6,5.2) C1(-6,4.4) C2(-5.2,4.4) C3(-4.4,4.4) C4(-3.6,4.4) C5(-2.8,4.4) C6(-2,4.4) C7(-1.2,4.4) C8(-0.4,4.4) C9(0.4,4.4) C10(1.2,4.4) C11(2,4.4) C12(2.8,4.4) C13(3.6,4.4) C14(4.4,4.4) C15(5.2,4.4) C16(6,4.4) D1(-6,3.6) D2(-5.2,3.6) D3(-4.4,3.6) D4(-3.6,3.6) D5(-2.8,3.6) D6(-2,3.6) D7(-1.2,3.6) D8(-0.4,3.6) D9(0.4,3.6) D10(1.2,3.6) D11(2,3.6) D12(2.8,3.6) D13(3.6,3.6) D14(4.4,3.6) D15(5.2,3.6) D16(6,3.6) E1(-6,2.8) E2(-5.2,2.8) E3(-4.4,2.8) E4(-3.6,2.8) E5(-2.8,2.8) E6(-2,2.8) E7(-1.2,2.8) E8(-0.4,2.8) E9(0.4,2.8) E10(1.2,2.8) E11(2,2.8) E12(2.8,2.8) E13(3.6,2.8) E14(4.4,2.8) E15(5.2,2.8) E16(6,2.8) F1(-6,2) F2(-5.2,2) F3(-4.4,2) F4(-3.6,2) F5(-2.8,2) F6(-2,2) F7(-1.2,2) F8(-0.4,2) F9(0.4,2) F10(1.2,2) F11(2,2) F12(2.8,2) F13(3.6,2) F14(4.4,2) F15(5.2,2) F16(6,2) G1(-6,1.2) G2(-5.2,1.2) G3(-4.4,1.2) G4(-3.6,1.2) G5(-2.8,1.2) G6(-2,1.2) G7(-1.2,1.2) G8(-0.4,1.2) G9(0.4,1.2) G10(1.2,1.2) G11(2,1.2) G12(2.8,1.2) G13(3.6,1.2) G14(4.4,1.2) G15(5.2,1.2) G16(6,1.2) H1(-6,0.4) H2(-5.2,0.4) H3(-4.4,0.4) H4(-3.6,0.4) H5(-2.8,0.4) H6(-2,0.4) H7(-1.2,0.4) H8(-0.4,0.4) H9(0.4,0.4) H10(1.2,0.4) H11(2,0.4) H12(2.8,0.4) H13(3.6,0.4) H14(4.4,0.4) H15(5.2,0.4) H16(6,0.4) J1(-6,-0.4) J2(-5.2,-0.4) J3(-4.4,-0.4) J4(-3.6,-0.4) J5(-2.8,-0.4) J6(-2,-0.4) J7(-1.2,-0.4) J8(-0.4,-0.4) J9(0.4,-0.4) J10(1.2,-0.4) J11(2,-0.4) J12(2.8,-0.4) J13(3.6,-0.4) J14(4.4,-0.4) J15(5.2,-0.4) J16(6,-0.4) K1(-6,-1.2) K2(-5.2,-1.2) K3(-4.4,-1.2) K4(-3.6,-1.2) K5(-2.8,-1.2) K6(-2,-1.2) K7(-1.2,-1.2) K8(-0.4,-1.2) K9(0.4,-1.2) K10(1.2,-1.2) K11(2,-1.2) K12(2.8,-1.2) K13(3.6,-1.2) K14(4.4,-1.2) K15(5.2,-1.2) K16(6,-1.2) L1(-6,-2) L2(-5.2,-2) L3(-4.4,-2) L4(-3.6,-2) L5(-2.8,-2) L6(-2,-2) L7(-1.2,-2) L8(-0.4,-2) L9(0.4,-2) L10(1.2,-2) L11(2,-2) L12(2.8,-2) L13(3.6,-2) L14(4.4,-2) L15(5.2,-2) L16(6,-2) M1(-6,-2.8) M2(-5.2,-2.8) M3(-4.4,-2.8) M4(-3.6,-2.8) M5(-2.8,-2.8) M6(-2,-2.8) M7(-1.2,-2.8) M8(-0.4,-2.8) M9(0.4,-2.8) M10(1.2,-2.8) M11(2,-2.8) M12(2.8,-2.8) M13(3.6,-2.8) M14(4.4,-2.8) M15(5.2,-2.8) M16(6,-2.8) N1(-6,-3.6) N2(-5.2,-3.6) N3(-4.4,-3.6) N4(-3.6,-3.6) N5(-2.8,-3.6) N6(-2,-3.6) N7(-1.2,-3.6) N8(-0.4,-3.6) N9(0.4,-3.6) N10(1.2,-3.6) N11(2,-3.6) N12(2.8,-3.6) N13(3.6,-3.6) N14(4.4,-3.6) N15(5.2,-3.6) N16(6,-3.6) P1(-6,-4.4) P2(-5.2,-4.4) P3(-4.4,-4.4) P4(-3.6,-4.4) P5(-2.8,-4.4) P6(-2,-4.4) P7(-1.2,-4.4) P8(-0.4,-4.4) P9(0.4,-4.4) P10(1.2,-4.4) P11(2,-4.4) P12(2.8,-4.4) P13(3.6,-4.4) P14(4.4,-4.4) P15(5.2,-4.4) P16(6,-4.4) R1(-6,-5.2) R2(-5.2,-5.2) R3(-4.4,-5.2) R4(-3.6,-5.2) R5(-2.8,-5.2) R6(-2,-5.2) R7(-1.2,-5.2) R8(-0.4,-5.2) R9(0.4,-5.2) R10(1.2,-5.2) R11(2,-5.2) R12(2.8,-5.2) R13(3.6,-5.2) R14(4.4,-5.2) R15(5.2,-5.2) R16(6,-5.2) T1(-6,-6) T2(-5.2,-6) T3(-4.4,-6) T4(-3.6,-6) T5(-2.8,-6) T6(-2,-6) T7(-1.2,-6) T8(-0.4,-6) T9(0.4,-6) T10(1.2,-6) T11(2,-6) T12(2.8,-6) T13(3.6,-6) T14(4.4,-6) T15(5.2,-6) T16(6,-6)
CC0201
  rect 0.47x0.381 smd: 1(-0.343,0) 2(0.343,0)
CC0402_25
  round 0.635 smd: 1(-0.508,0) 2(0.508,0)
CC0402_TOL0P2
  rect 0.457x0.61 smd: 1(-0.475,0) 2(0.475,0)
CC0603_OV
  oval 0.889x1.143 smd: 1(-0.762,0) 2(0.762,0)
CC0805_OV
  oval 0.889x1.524 smd: 1(-0.965,0) 2(0.965,0)
CC1206_OV
  oval 1.016x1.778 smd: 1(-1.524,0) 2(1.524,0)
CC1210
  rect 1.778x2.845 smd: 1(-1.397,0) 2(1.397,0)
CON2_2P8_JACK_TH
  rect 1.422x1.422 hole 0.787: 1(0,0)
  round 1.422 hole 0.787: 2(-2.8,0)
  round 1.524 hole 0.889: SH1(2.4,2.6) SH2(-5.2,2.6) SH3(3.05,-7.15) SH4(-5.85,-7.15)
CON2X5_50_TH_RA
  rect 1.092x1.092 hole 0.737: 1(0,0)
  round 1.092 hole 0.737: 2(0,1.27) 3(1.27,0) 4(1.27,1.27) 5(2.54,0) 6(2.54,1.27) 7(3.81,0) 8(3.81,1.27) 9(5.08,0) 10(5.08,1.27)
CON50_0P4_11P72X2P05_SM_A
  rect 0.203x0.66 smd: 1(-4.8,-1.355) 2(-4.8,1.355) 3(-4.4,-1.355) 4(-4.4,1.355) 5(-4,-1.355) 6(-4,1.355) 7(-3.6,-1.355) 8(-3.6,1.355) 9(-3.2,-1.355) 10(-3.2,1.355) 11(-2.8,-1.355) 12(-2.8,1.355) 13(-2.4,-1.355) 14(-2.4,1.355) 15(-2,-1.355) 16(-2,1.355) 17(-1.6,-1.355) 18(-1.6,1.355) 19(-1.2,-1.355) 20(-1.2,1.355) 21(-0.8,-1.355) 22(-0.8,1.355) 23(-0.4,-1.355) 24(-0.4,1.355) 25(0,-1.355) 26(0,1.355) 27(0.4,-1.355) 28(0.4,1.355) 29(0.8,-1.355) 30(0.8,1.355) 31(1.2,-1.355) 32(1.2,1.355) 33(1.6,-1.355) 34(1.6,1.355) 35(2,-1.355) 36(2,1.355) 37(2.4,-1.355) 38(2.4,1.355) 39(2.8,-1.355) 40(2.8,1.355) 41(3.2,-1.355) 42(3.2,1.355) 43(3.6,-1.355) 44(3.6,1.355) 45(4,-1.355) 46(4,1.355) 47(4.4,-1.355) 48(4.4,1.355) 49(4.8,-1.355) 50(4.8,1.355)
  rect 0.356x0.66 smd: SH1(-5.275,1.355) SH2(-5.275,-1.355) SH3(5.275,-1.355) SH4(5.275,1.355)
CON_1X2_1P25_5P8X4P1_SM_RA
  rect 0.61x1.702 smd: 1(-0.625,2.247) 2(0.625,2.247)
  rect 0.991x2.692 smd: S1(-2.455,-0.953) S2(2.455,-0.953)
IND2520
  rect 0.914x2.21 smd: 1(-1.05,0) 2(1.05,0)
IND_3P4X2P7_SMT
  rect 1.041x0.61 smd: 1(-1.525,-0.5) 2(1.525,-0.5) 3(1.525,0.5) 4(-1.525,0.5)
IND_0402
  round 0.635 smd: 1(-0.508,0) 2(0.508,0)
IND_1608
  rect 0.61x0.813 smd: 1(-0.7,0) 2(0.7,0)
IND_ACT1210_SM
  rect 1.041x0.61 smd: 1(-1.525,0.5) 2(-1.525,-0.5) 3(1.525,-0.5) 4(1.525,0.5)
LED_0603
  rect 0.838x0.787 smd: A(-0.775,0) C(0.775,0)
MH236-146P
  round 5.994 hole 3.708: 1(0,0)
QFN36_0P5_6X6
  rect 0.813x0.254 smd: 1(-2.8,2) 2(-2.8,1.5) 3(-2.8,1) 4(-2.8,0.5) 5(-2.8,0) 6(-2.8,-0.5) 7(-2.8,-1) 8(-2.8,-1.5) 9(-2.8,-2) 19(2.8,-2) 20(2.8,-1.5) 21(2.8,-1) 22(2.8,-0.5) 23(2.8,0) 24(2.8,0.5) 25(2.8,1) 26(2.8,1.5) 27(2.8,2)
  rect 0.254x0.813 smd: 10(-2,-2.8) 11(-1.5,-2.8) 12(-1,-2.8) 13(-0.5,-2.8) 14(0,-2.8) 15(0.5,-2.8) 16(1,-2.8) 17(1.5,-2.8) 18(2,-2.8) 28(2,2.8) 29(1.5,2.8) 30(1,2.8) 31(0.5,2.8) 32(0,2.8) 33(-0.5,2.8) 34(-1,2.8) 35(-1.5,2.8) 36(-2,2.8)
  rect 4.115x4.115 smd: 37(0,0)
RC0402_25
  round 0.635 smd: 1(-0.508,0) 2(0.508,0)
RC0603_OV
  oval 0.889x1.143 smd: 1(-0.762,0) 2(0.762,0)
RC0805_OV
  oval 0.889x1.524 smd: 1(-0.965,0) 2(0.965,0)
RC1206_OV
  oval 1.016x1.778 smd: 1(-1.524,0) 2(1.524,0)
SO8_1P27_4X5
  rect 1.6x0.61 smd: 1(-2.7,1.905) 2(-2.7,0.635) 3(-2.7,-0.635) 4(-2.7,-1.905) 5(2.7,-1.905) 6(2.7,-0.635) 7(2.7,0.635) 8(2.7,1.905)
SOT23_A
  rect 0.787x0.889 smd: 1(-0.94,-1.003) 2(0.94,-1.003) 3(0,1.003)
SOT2089-1_FCQFN28_0P5_4P5SQ
  custom 0.975x0.27 smd: 1(-2.163,1.5) 7(-2.163,-1.5) 15(2.163,-1.5) 21(2.175,1.5)
  custom 2.029x0.25 smd: 2(-1.635,1) 6(-1.635,-1) 16(1.635,-1) 20(1.635,1)
  custom 2.029x0.28 smd: 3(-1.635,0.515) 5(-1.635,-0.515) 17(1.635,-0.515) 19(1.635,0.515)
  custom 5.3x5.3 smd: 4(0,0)
  custom 0.838x0.975 smd: 8(-1.5,-2.163) 14(1.5,-2.163) 22(1.5,2.163) 28(-1.5,2.163)
  custom 0.27x1 smd: 9(-1,-2.15) 10(-0.5,-2.15) 12(0.5,-2.15) 13(1,-2.15) 23(1,2.15) 24(0.5,2.15) 26(-0.5,2.15) 27(-1,2.15)
SW4_DIP_1P27_4P4X5P7
  rect 1.6x0.762 smd: 1(-2.54,0.635) 2(2.54,0.635) 3(-2.54,-0.635) 4(2.54,-0.635)
TESTPOINT_35MIL
  round 0.889 smd: 1(0,0)
unnamed#2
  round 1.524 smd: (0,0)
X2SON8_0P35_1X1P35MM
  rect 0.66x0.17 smd: 1(-0.4,0.525)
  rect 0.61x0.17 smd: 2(-0.425,0.175) 3(-0.425,-0.175) 4(-0.425,-0.525) 5(0.425,-0.525) 6(0.425,-0.175) 7(0.425,0.175) 8(0.425,0.525)
XTL4_2P1X1P7MM_SM
  rect 0.762x0.711 smd: 1(-0.675,-0.5) 2(0.675,-0.5) 3(0.675,0.5) 4(-0.675,0.5)

## Nets
GND: BH1.1 BH2.1 BH3.1 C6.2 C126.2 C127.2 C134.2 C137.2 C138.2 C139.2 C140.2 C141.2 C146.2 C149.2 C150.2 C151.2 C152.2 C153.2 C154.2 C155.2 C156.2 C159.2 C165.2 C167.2 C169.2 C170.2 C171.2 C172.2 C173.2 C174.2 C175.2 C176.2 C177.2 C178.2 C179.2 C180.2 C181.2 C182.2 C183.2 C184.2 C186.2 C187.2 C188.2 C191.2 C192.2 C193.2 C194.2 C195.2 C196.2 C201.2 C202.2 C203.2 C204.2 C205.2 C206.2 C207.2 C211.2 C212.2 C213.2 C217.2 C218.2 C219.2 C220.2 C221.2 C222.2 C223.2 C226.2 C230.2 C231.2 C232.2 C233.2 C234.2 C235.2 C236.2 C237.2 C238.2 C375.2 C388.2 C398.2 C399.2 C401.2 C403.2 C407.2 C408.2 C411.2 C422.2 C423.2 C424.2 C430.2 C431.2 C432.2 C434.2 C435.2 C439.2 C441.2 C444.2 C445.2 C448.2 C449.2 C450.2 C451.2 C452.2 C454.2 C455.2 C456.2 C457.2 C458.2 C459.2 C460.2 C461.2 C462.2 C463.2 C464.2 C466.2 C468.2 C470.2 C471.2 C475.2 C483.2 C484.2 C485.2 C486.2 C487.2 C488.2 C489.2 C490.2 C491.2 C492.2 C493.2 C494.2 C495.2 C496.2 C505.2 C506.2 C507.2 C508.2 C509.2 C510.2 C511.2 C514.2 C515.2 C516.2 C517.2 C521.2 C524.2 C525.2 C526.2 C527.2 C528.2 C529.2 C530.2 D33.C(CATHODE) D34.C(CATHODE) D35.C(CATHODE) D36.C(CATHODE) D66.3(COM_CATHODE) D67.C(CATHODE) D68.3(COM_CATHODE) D69.C(CATHODE) D70.3(COM_CATHODE) D71.C(CATHODE) D72.3(COM_CATHODE) D73.C(CATHODE) D74.3(COM_CATHODE) D75.C(CATHODE) D76.3(COM_CATHODE) D77.C(CATHODE) D79.C(CATHODE) J26.S1 J26.S2 J27.S1 J27.S2 J28.S1 J28.S2 J29.S1 J29.S2 J30.S1 J30.S2 J31.S1 J31.S2 J33.1 J33.2 J33.7 J33.8 J33.10 J33.16 J33.18 J33.19 J33.24 J33.25 J33.27 J33.28 J33.29 J33.30 J33.39 J33.40 J33.41 J33.42 J33.43 J33.44 J33.49 J33.50 J33.SH1 J33.SH2 J33.SH3 J33.SH4 J37.3 J37.5 R93.2 R160.2 R184.2 R208.2 R209.2 R216.2 R227.2 R228.2 R229.2 R230.2 R459.2 R466.2 R489.2 R504.2 R505.2 R508.2 R509.2 R512.2 R515.2 R518.2 R519.2 R535.2 R539.2 R545.2 R546.2 R550.2 R553.2 R561.2 R567.1 R568.2 R569.1 R577.2 R578.2 R584.1 R585.1 R586.1 R590.2 R591.2 U53.4 U54.37 U55.37 U57.3(COM_CATHODE) U58.A1 U58.A3 U58.A4 U58.A5 U58.A9 U58.A10 U58.A11 U58.A15 U58.A16 U58.B3 U58.B4 U58.B5 U58.B9 U58.B10 U58.B11 U58.C4 U58.C6 U58.C11 U58.C13 U58.D2 U58.D3 U58.D6 U58.D10 U58.D14 U58.D16 U58.E1 U58.E14(VSSIO_REFCLK3) U58.E16 U58.F3 U58.F7 U58.F10 U58.F14 U58.F15 U58.F16 U58.G3 U58.G6 U58.G7 U58.G8 U58.G9 U58.G10 U58.G14 U58.H7 U58.H8 U58.H9 U58.H10 U58.H14 U58.J1 U58.J2 U58.J3 U58.J7 U58.J8 U58.J9 U58.J10 U58.J14 U58.J16 U58.K7 U58.K8 U58.K9 U58.K10 U58.K14 U58.K15 U58.K16 U58.L7 U58.L8 U58.L9 U58.L10 U58.L14 U58.M1 U58.M2 U58.M3 U58.M14 U58.M15 U58.M16 U58.P9 U58.R1 U58.R2 U58.R3 U58.R5 U58.R7 U58.R9 U58.R11 U58.R13 U58.R15 U58.R16 U58.T1 U58.T2 U58.T15 U58.T16 U63.4 U64.3(COM_CATHODE) U65.1 X1.2 X1.4
VDD_PF_1V1: C146.1 C178.1 C403.1 C411.1 C471.1 C491.1 C492.1 C506.1 C509.1 L13.1 L14.1 L15.1 L21.1 L48.1 L53.1 L54.1 LBK2.2 U63.24
VDD_PF_1V8: C149.1 C153.1 C407.1 C408.1 C507.1 C511.1 L16.1 L17.1 L44.2 L46.2 LBK3.2 U63.10
VDD_PF_3V3: C134.1 C220.1 C398.1 C399.1 C431.1 C459.1 C462.1 C488.1 C489.1 C490.1 C508.1 C510.1 C514.1 C529.1 L18.1 L19.1 L23.1 L41.2 L42.2 L50.1 L51.1 L52.1 L56.1 L57.1 LBK1.2 R200.1 R531.1 R547.1 R548.1 R564.1 R581.1 R582.1 S1.1 S1.3 U54.9 U55.9 U63.26
VDD_SYS_1V8: J33.26 R595.1 R596.1 U65.2
VDD_SYS_3V3: C525.1 C526.1 C528.1 J33.31 J33.32 J33.33 J33.34 J33.35 J33.36 J33.37 J33.38 R171.1 R565.1
VDD_SYS_5V0: C493.1 C494.1 C495.1 C496.1 C521.1 C524.1 C527.1 J33.45 J33.46 J33.47 J33.48 R566.1 U63.2 U63.6 U63.12 U63.20
VDDA_TRX_F: C441.1 C445.1 C461.1 L46.1 U55.8 U55.13 U55.16
VDDA_TRX_F_2: C439.1 C444.1 C458.1 L44.1 U54.8 U54.13 U54.16
VDDIO_PHY1: C137.1 C424.1 C432.1 C451.1 L42.1 R511.2 U55.22 U55.27 U55.35
VDDIO_PHY_2: C140.1 C423.1 C430.1 C450.1 L41.1 R506.1 R507.2 U54.22 U54.27 U54.35
VDDOTP: R93.1 TP245.1(TP) U63.23
CLK_TJA1: C513.2 R587.1
CLK_TJA2: C512.2 R588.1
ENET_MDC: J33.23 R596.2 U65.3
ENET_MDIO: J33.21 R595.2 U65.4
ETH_RST: J33.20 R562.1 R563.1 R579.1
ETH_RX1_N: C500.1 U55.30
ETH_RX1_P: C499.1 U55.31
ETH_RX2_N: C498.1 U54.30
ETH_RX2_P: C497.1 U54.31
ETH_RX4_N: C472.1 J33.6
ETH_RX4_P: C474.1 J33.4
ETH_TX1_N: C482.2 U58.P15
ETH_TX1_P: C481.2 U58.P16
ETH_TX2_N: C501.2 U58.N2
ETH_TX2_P: C502.2 U58.N1
ETH_TX4_N: J33.14 U58.K2
ETH_TX4_P: J33.12 U58.K1
ETH_WAKE_INT: J33.22 R552.1 R580.2
GPIO8_TJA1: U55.26 U58.J5
GPIO8_TJA2: U54.26 U58.L4
GPIO9_TJA1: U55.28 U58.K5
GPIO9_TJA2: U54.28 U58.M4
I3C2A_SCL: J33.5 R571.2
I3C2A_SDA: J33.3 R572.2
INT_TJA1: R200.2 U55.2(\I\N\T\) U58.E9
INT_TJA2: R531.2 U54.2(\I\N\T\) U58.J4
JTAG_RST_ETH: J37.10(B5) R579.2 U58.L13
JTAG_TCK_ETH: J37.4 U58.J12
JTAG_TDI_ETH: J37.8 U58.K12
JTAG_TDO_ETH: J37.6 U58.L12
JTAG_TMS_ETH: J37.2 U58.K13
PHY_MDC_TJA: R574.2 U54.1 U55.1 U58.C15
PHY_MDIO_TJA: R573.2 U54.36 U55.36 U58.C16
QSPI_IO0: U53.5 U58.E12
QSPI_IO1: U53.2 U58.E13
QSPI_IO2: U53.3(W\P\_IO2) U58.D13
QSPI_IO3: R170.2 U53.7 U58.F13
QSPI_SCLK: U53.6 U58.F12
QSPI_SS_N: R173.2 U53.1 U58.D12
RESET_TJA1: R548.2 U55.10 U58.E10
RESET_TJA2: R547.2 U54.10 U58.K4
SHIELD: C516.1 C517.1 J32.SH1 J32.SH2 J32.SH3 J32.SH4 J35.SH1 J35.SH2 J35.SH3 J35.SH4 R590.1 R591.1
SMI_AP_MDC: R593.2 U58.N6 U65.6
SMI_AP_MDIO: R594.2 U58.P6 U65.5
SPI4_PCS1: J33.15 U58.F4
SPI4_PCS2: J33.17 U58.F5
SPI4_SCK: J33.13 U58.E4
SPI4_SIN: J33.11 U58.D4
SPI4_SOUT: J33.9 U58.E5
SW2_BOOT_OPTION0: R230.1 S1.4 U58.N7
SW2_BOOT_OPTION1: R229.1 S1.2 U58.P7
SW_100BT1_TRX5_M: L35.1 U58.T4
SW_100BT1_TRX5_P: L35.2 U58.T3
SW_100BT1_TRX6_M: L37.1 U58.T6
SW_100BT1_TRX6_P: L37.2 U58.T5
SW_100BT1_TRX7_M: L39.1 U58.T8
SW_100BT1_TRX7_P: L39.2 U58.T7
SW_100BT1_TRX8_M: L40.1 U58.T10
SW_100BT1_TRX8_P: L40.2 U58.T9
SW_100BT1_TRX9_M: L47.1 U58.T12
SW_100BT1_TRX9_P: L47.2 U58.T11
SW_100BT1_TRX10_M: L49.1 U58.T14
SW_100BT1_TRX10_P: L49.2 U58.T13
SW_P5_LED: R464.1 U58.E7
SW_P6_LED: R473.1 U58.C8
SW_P7_LED: R493.1 U58.D8
SW_P8_LED: R520.1 U58.E8
SW_P9_LED: R537.1 U58.C9
SW_P10_LED: R541.1 U58.D9
SW_VDD11_CORE: C179.1 C180.1 C183.1 C188.1 C205.1 C206.1 C211.1 C212.1 C222.1 C486.1 L53.2 U58.E6 U58.E11 U58.F6 U58.F11 U58.K6 U58.K11 U58.L6 U58.L11 U58.M11
SW_VDD33_AO: C218.1 C485.1 L52.2 U58.M8
SW_VDDA11: C177.1 C181.1 C217.1 C470.1 L48.2 U58.C2 U58.E2 U58.M9
SW_VDDA11_SGMII: C213.1 C223.1 C226.1 C487.1 L54.2 U58.L3 U58.N3 U58.N14
SW_VDDA25: C202.1 C231.1 C232.1 C234.1 C235.1 C236.1 C237.1 C238.1 U58.H5 U58.P8 U58.R4 U58.R6 U58.R8 U58.R10 U58.R12 U58.R14
SW_VDDA33_SGMII: C207.1 C230.1 C233.1 C483.1 L50.2 U58.K3 U58.P3 U58.P14
SW_VDDA33_VREG_IN: C195.1 C204.1 L23.2 U58.H6
SW_VDDIO: C126.1 C127.1 C159.1 C176.1 C182.1 C184.1 C186.1 C187.1 C191.1 C192.1 C196.1 C203.1 C221.1 C484.1 L51.2 R170.1 R173.1 R193.1 R194.1 R554.1 R589.1 U53.8 U58.B16 U58.C3 U58.F1 U58.F8 U58.F9 U58.G1 U58.G11 U58.H1 U58.H11 U58.J6 U58.M6
SW_VDDIO_DBG: C201.1 C515.1 L56.2 R558.1 U58.J11
SW_VDDIO_HOST: C194.1 C219.1 C530.1 L57.2 R5.1 R191.1 R195.1 R213.1 R215.1 R218.1 R220.1 R222.1 R223.1 R224.1 R225.1 R226.1 R555.1 R593.1 R594.1 U58.E3 U58.M7
SW_VDDIO_MII2: C150.1 C170.1 C172.1 L16.2 U58.C5 U58.C7
SW_VDDIO_MII3: C169.1 C171.1 C175.1 L17.2 U58.C10 U58.C12
SW_VDDIO_SMI_OUT: C174.1 R573.1 R574.1 R589.2 U58.C14
TJA1_TRX_CON_M: C447.2 J32.2 R186.1 U57.1
TJA1_TRX_CON_P: C446.2 J32.1 R187.1 U57.2
TJA1_TRX_M: L45.4 U55.15
TJA1_TRX_P: L45.1 U55.14
TJA1_WAKE_IO: R545.1 R546.1 R549.2 R551.1 U54.11 U55.11
TJA2_TRX_CON_M: C504.2 J35.2 R560.1 U64.1
TJA2_TRX_CON_P: C503.2 J35.1 R559.1 U64.2
TJA2_TRX_M: L55.4 U54.15
TJA2_TRX_P: L55.1 U54.14
TRX_CON0_C_N: C378.2 L35.4
TRX_CON0_C_P: C376.2 L35.3
TRX_CON0_N: C378.1 D66.1 J26.2 R462.1
TRX_CON0_P: C376.1 D66.2 J26.1 R454.1
TRX_CON1_C_N: C392.2 L37.4
TRX_CON1_C_P: C389.2 L37.3
TRX_CON1_N: C392.1 D68.1 J27.2 R470.1
TRX_CON1_P: C389.1 D68.2 J27.1 R465.1
TRX_CON2_C_N: C404.2 L39.4
TRX_CON2_C_P: C402.2 L39.3
TRX_CON2_N: C404.1 D70.1 J28.2 R490.1
TRX_CON2_P: C402.1 D70.2 J28.1 R481.1
TRX_CON3_C_N: C426.2 L40.4
TRX_CON3_C_P: C425.2 L40.3
TRX_CON3_N: C426.1 D72.1 J29.2 R517.1
TRX_CON3_P: C425.1 D72.2 J29.1 R501.1
TRX_CON4_C_N: C469.2 L47.4
TRX_CON4_C_P: C467.2 L47.3
TRX_CON4_N: C469.1 D74.1 J30.2 R536.1
TRX_CON4_P: C467.1 D74.2 J30.1 R532.1
TRX_CON5_C_N: C479.2 L49.4
TRX_CON5_C_P: C477.2 L49.3
TRX_CON5_N: C479.1 D76.1 J31.2 R540.1
TRX_CON5_P: C477.1 D76.2 J31.1 R538.1
N20063595: R549.1 R550.1 R554.2 U58.N5
N20063756: R208.1 U58.J15
N20063923: TP22.1(TP) U58.F2
N20063929: TP21.1(TP) U58.B15
N20063982: R191.2 R562.2 U58.P4
N20064039: R195.2 R563.2 U58.G4
N20064047: C452.1 U58.C1 X1.1
N20064083: R587.2 U58.G2
N20064132: R588.2 U58.H2
N20064194: C468.1 U58.D1 X1.3
N20064311: C474.2 U58.L1
N20064322: C472.2 U58.L2
N20064388: R226.2 U58.N10
N20064473: R228.1 U58.M10
N20064477: R227.1 R555.2 U58.N9
N20067427: C154.1 R211.2 U58.H4
N20068000: C193.1 R211.1 U58.H3
N20070589: C375.1 R454.2 R459.1 R462.2
N20070626: D67.A R464.2
N20070845: C388.1 R465.2 R466.1 R470.2
N20070884: D69.A R473.2
N20071078: C401.1 R481.2 R489.1 R490.2
N20071117: D71.A R493.2
N20071311: C422.1 R501.2 R515.1 R517.2
N20071350: D73.A R520.2
N20071559: C466.1 R532.2 R535.1 R536.2
N20071598: D75.A R537.2
N20071777: C475.1 R538.2 R539.1 R540.2
N20071816: D77.A R541.2
N20073301: C165.1 C460.1 L18.2 U55.7
N20073443: C138.1 C435.1 C449.1 L15.2 U55.29 U55.34
N20073606: C151.1 C173.1 C463.1 C464.1 L21.2 U55.3 U55.4
N20073885: C156.1 C513.1 U55.6
N20073941: R231.1 R519.1 U55.17
N20073964: R232.1 U55.18
N20074016: R512.1 U55.20
N20074020: C482.1 U55.33
N20074039: C481.1 U55.32
N20074083: R509.1 U55.24
N20074085: R508.1 U55.25
N20074093: D33.A R231.2
N20074095: D34.A R232.2
N20074265: C446.1 L45.2
N20074296: C447.1 L45.3
N20074346: C141.1 R184.1 R186.2 R187.2
N20076043: C167.1 C457.1 L19.2 U54.7
N20076182: C139.1 C434.1 C448.1 L13.2 U54.29 U54.34
N20076345: C152.1 C155.1 C454.1 C455.1 L14.2 U54.3 U54.4
N20076624: C456.1 C512.1 U54.6
N20076680: R233.1 R518.1 U54.17
N20076703: R234.1 U54.18
N20076816: R505.1 R506.2 U54.24
N20076820: R504.1 U54.25
N20076828: D35.A R233.2
N20076830: D36.A R234.2
N20084269: LBK3.1 U63.5
N20086135: R565.2 TP250.1(TP) U63.9(XFAILB)
N20086262: D79.A R171.2 TP252.1(TP) U63.8
N20086448: R564.2 TP249.1(TP) U63.7
N20087000: LBK1.1 U63.3
N20087655: R566.2 U63.1
N20089271: R160.1 U63.22
N20089763: R571.1 R582.2 U63.27
N20089768: R572.1 R581.2 U63.28
N20090580: LBK2.1 U63.19
N20091958: R586.2 U63.21
N20091963: R585.2 U63.15
N20178006: R194.2 U58.B2
N20183080: R222.2 U58.N12
N20183085: R223.2 U58.P12
N20183704: R209.1 U58.N8
N20183709: R216.1 U58.P10
N20184853: R225.2 U58.N11
N20184913: R224.2 U58.P11
N20184918: R215.2 U58.N13
N20184923: R220.2 U58.P13
N20184928: R213.2 U58.M13
N20184938: R218.2 U58.M12
N20203414: R511.1 U55.23
N20214787: R507.1 U54.23
N20222602: R551.2 R552.2 R553.1 U58.N4
N20229760: C498.2 U58.P2
N20229763: C497.2 U58.P1
N20229809: C499.2 U58.N16
N20231645: C501.1 U54.33
N20231659: C502.1 U54.32
N20245926: C500.2 U58.N15
N20249432: J37.1 R558.2
N20256327: C503.1 L55.2
N20256378: C504.1 L55.3
N20256412: C505.1 R559.2 R560.2 R561.1
N20262685: R193.2 U58.A2
N20262729: TP248.1(TP) U58.G5
N20265717: R569.2 U63.17
N20265722: R584.2 U63.14
N20267483: J37.7 R577.1
N20267572: J37.9 R578.1
N20267788: TP251.1(TP) U58.B1
N20267824: R580.1 U58.D5
N20268786: R568.1 U63.16
N20268791: R567.2 U63.13
N20349606: C6.1 R5.2 U65.7(VREF2) U65.8

Pads without a net: U54 5 12 19 20 21; U55 5 12 19 21; U58 A6 A7 A8 A12 A13 A14 B6 B7 B8 B12 B13 B14 D7 D11 D15 E15 G12 G13 G15 G16 H12 H13 H15 H16 J13 L5 L15 L16 M5 P5

## Via types
v1: diameter 0.457, hole 0.203, TOP to BOTTOM, 498 vias
v2: diameter 0.457, hole 0.206, TOP to BOTTOM, 224 vias

## Routing (per net, layer and track width the routed paths; a pad name or vN(x,y) marks a point on that pad's centre or on a via; arc(x,y) is an arc through that point)
GND: length 227.5
  TOP w0.203: J33.SH1 62.42,18.93 v1(62.68,19.19) 62.47,19.4 J33.2 ; J33.40 62.94,27 v1(63.21,27.26) 62.67,27.8 J33.44 ; J33.39 64.97,27 65.37,27.4 ; J33.25 64.26,24.2 63.87,24.59 v1(63.87,24.73) 64.14,25 J33.29 ; J33.8 62.38,20.6 v1(62.62,20.84) 62.46,21 J33.10 ; v1(65.38,24.61) 65.37,24.6 J33.27 ; v1(65.71,22.8) 65.27,22.8 65.07,23 J33.19 ; J33.SH2 65.11,18.93 v1(65.38,19.2) 65.18,19.4 J33.1 ; J33.18 62.46,22.6 v1(62.63,22.43) 62.41,22.2 J33.16 ; J33.42 61.39,27.4 v1(61.13,27.14) ; 65.37,27.4 v1(65.39,27.43) 65.02,27.8 J33.43 ; 65.37,27.4 J33.41 ; 61.23,24.39 61.23,24.85 61.38,25 J33.30
  TOP w0.254: v2(54.55,22.84) R553.2 ; C181.2 43.91,25.2 v1(43.46,25.2) ; U65.1 49.97,10.18 C6.2 ; C237.2 44.1,21.91 43.46,21.26 v1(43.46,21.2) ; J33.7 65.36,20.6 v1(65.38,20.62) ; v1(61.13,27.14) 60.93,26.94 C527.2 ; J33.28 61.44,24.6 v1(61.14,24.3) ; J33.49 J33.SH3 ; J33.50 J33.SH4 ; J33.24 62.32,23.8 v1(62.64,23.48)
  TOP w0.305: 52.56,1.14 D69.C ; D69.C 51.9,1.83 ; D69.C 53.22,1.83 ; D69.C 52.56,2.51 ; 36.9,1.83 D73.C ; D73.C 38.22,1.83 ; D73.C 37.56,1.14 ; D73.C 37.56,2.51 ; D75.C 30.06,2.51 ; D75.C 30.72,1.83 ; D75.C 30.06,1.14 ; D75.C 29.4,1.83 ; D71.C 45.06,2.51 ; D71.C 45.06,1.14 ; D71.C 45.72,1.83 ; D71.C 44.4,1.83 ; 59.4,1.83 D67.C ; D67.C 60.06,1.14 ; D67.C 60.72,1.83 ; D67.C 60.06,2.51 ; v1(51.28,25.32) 51.28,25.66 50.98,25.96 C193.2 ; v2(22.56,1.83) 23.22,1.83 ; v2(22.56,1.83) 21.9,1.83 ; v2(22.56,1.83) 22.56,2.51 ; v2(22.56,1.83) 22.56,1.14
  TOP w0.381: v1(51.28,25.32) 51.57,25.32 52.21,25.97 C176.2 ; v1(66.99,24.8) 67,24.8 C525.2 66.99,25.56 C526.2 ; C183.2 41.91,30 v1(42.66,30) ; v2(65.63,31) 65.84,30.79 C524.2 ; C524.2 65.85,30.11 C521.2 ; C524.2 64.86,30.12 64.61,29.87 J33.SH3 ; v1(62.63,29.43) 62.58,29.48 J33.SH4 ; v2(50.66,29.2) 51.68,29.2 52.15,28.73 C182.2 C221.2 ; 51.46,22.25 51.46,21.82 51.56,21.72 R550.2 ; 51.46,22.25 51.01,21.8 C213.2 ; 51.46,22.25 v1(51.46,22.29) ; v1(46.66,30.8) 46.6,30.86 C172.2 ; C231.2 46.21,26.08 45.91,26.38 C195.2 ; C528.2 59.59,25.98 59.92,26.31 C527.2 59.71,27.15 v1(59.71,28.45) ; R230.2 v1(64.09,15.08) ; R93.2 R160.2 55.97,28.74 R586.1 ; v1(38.67,20.38) 38.67,21.16 C207.2 ; R504.2 v1(30.47,42.27) ; R229.2 v1(67.06,15.09)
  TOP w0.5: D36.C v1(4.19,35) ; R578.2 34.64,34.48 v1(34.15,34) ; R209.2 v2(45.39,15.52) ; v1(24.77,30.18) 25.41,30.18 25.49,30.25 ; D33.C v1(4.19,15.32) ; C445.2 27.02,24.63 v2(27.21,24.81) ; v1(50.47,9.06) 50.47,9.68 C6.2 ; v1(50.42,34.65) 50.42,35.05 C530.2 ; C508.2 v1(26.97,16.39) ; C204.2 49.07,41.66 49.06,41.65 v1(48.28,41.65) ; v1(37.27,25.6) 37.63,25.96 37.63,26.76 R208.2 ; C151.2 v1(31.54,15.53) ; C510.2 29.54,30.43 v2(30.02,29.95) ; C139.2 33.93,39.28 v2(33.96,39.3) ; J37.5 38.78,34.73 R577.2 ; C435.2 v2(30.81,22.32) ; R509.2 28.61,25.06 v2(28.37,24.81) ; D34.C v1(4.19,22.77) ; D35.C v1(4.19,27.93) ; R546.2 22.04,34.57 v1(22.03,34.58) ; C507.2 v1(24.48,17.2) ; C484.2 C483.2 C485.2 50.69,40.55 v1(49.85,40.55) ; v2(27.22,21.19) 27.22,20.33 C156.2
  L2_GND1 w0.5: 39.41,35.41 J37.3 40.69,35.41 ; 39.42,35.41 J37.5 38.14,35.41
  L5_GND2 w0.5: 38.14,35.41 J37.5 39.42,35.41 ; 40.69,35.41 J37.3 39.41,35.41
  BOTTOM w0.203: U58.R15 38.67,20.42 v1(38.67,20.38) ; v1(38.69,19.57) 38.69,19.63 U58.T15 ; v1(51.28,25.32) 50.94,25.66 50.32,25.66 U58.J1 ; U58.A1 v1(50.26,32.53) ; C491.2 v1(60.04,20.88)
  BOTTOM w0.254: U58.L8 v2(45.06,23.6) ; v1(49.87,23.59) 49.84,23.59 U58.M2 ; v1(48.26,32.4) U58.A4 U58.A5 ; U58.K16 v1(38.66,25.21) ; U58.R7 v2(45.86,20.4) ; U58.B11 v1(41.86,31.6) ; U58.K15 v1(38.66,24.4) ; U58.G3 v2(49.06,27.6) ; U58.J3 v2(49.06,25.2) ; v1(39.06,32.58) U58.A15 ; U58.D10 v1(42.66,30) ; U58.L9 v1(43.46,23.6) ; U58.R11 v2(41.86,20.4) ; U58.G8 v2(45.06,27.6) ; U58.F7 v1(45.86,28.4) ; U58.H10 v2(42.66,26.8) ; U58.E16 v1(37.86,29.2) U58.D16 ; U58.B4 v1(48.26,31.6) ; U58.H14 v1(39.47,26.01) ; U58.G9 v2(43.46,27.6) ; U58.J14 v1(39.46,25.2) ; U58.D2 v2(49.86,30) ; U58.F3 v2(49.06,28.4) ; U58.E14 v1(39.46,29.2) ; U58.F15 v1(38.66,28.4) ; U58.A9 v1(43.46,32.4) ; U58.A16 v2(37.86,32.4) ; U58.H7 v2(45.86,26.8) ; U58.E1 v2(50.66,29.2) ; U58.B10 v1(42.66,31.6) ; v1(63.32,32.1) 63.17,31.95 v2(60.28,31.95) v2(59.6,31.95) v2(58.92,31.95) 56.47,31.95 ; U58.M3 v2(49.06,22.8) ; U58.A11 v1(41.86,32.4) ; U58.D14 v2(39.46,30) ; U58.T16 v1(38.69,19.57) ; U58.K14 v1(39.46,24.4) ; U58.L10 v2(42.66,23.6) ; U58.R3 v2(49.06,20.4) ; U58.B3 v1(49.06,31.6) ; U58.B9 v1(43.46,31.6) ; U58.B5 v1(46.66,30.8) U58.C6 ; U58.M15 v1(38.66,23.6) U58.M16 ; U58.C13 v2(40.26,30.8) ; U58.K7 v2(45.86,24.4) ; U58.A3 v1(49.06,32.4) ; U58.J10 v2(42.66,25.2) ; U58.R2 v1(49.86,20.4) ; U58.D3 v2(49.06,30) ; U58.G10 v2(42.66,27.6) ; U58.J8 v1(45.06,25.2) ; U58.L14 v1(39.46,23.6) ; U58.G14 v1(39.46,27.6) ; U58.J16 v1(37.27,25.6) ; U58.M14 v2(39.46,22.8) ; U58.G6 v2(46.66,27.6) ; U58.R16 v1(38.67,20.38) ; U58.H8 v1(45.06,26.8) ; U58.J7 v2(45.86,25.2) ; U58.F10 v2(42.66,28.4) ; U58.F16 v1(37.86,28.4) ; U58.R1 v1(50.66,20.4) ; U58.F14 v1(39.46,28.4) ; U58.T1 v1(50.66,19.6) ; U58.L7 v2(45.86,23.6) ; U58.P9 v1(43.46,21.2) ; U58.R5 v2(47.46,20.4) ; U58.J9 v1(43.46,25.2) ; U58.R9 v2(43.46,20.4) ; U58.H9 v1(43.46,26.8) ; U58.G7 v1(45.86,27.6) ; U58.T2 v1(49.86,19.6) ; U58.C11 v2(41.86,30.8) ; U58.C4 v2(48.26,30.8) ; U58.K9 v1(43.46,24.4) ; U58.R13 v2(40.26,20.4) ; U58.K10 v2(42.66,24.4) ; U58.M1 v1(50.66,23.6) ; U58.K8 v1(45.06,24.4) ; U58.A10 v1(42.66,32.4) ; U58.D6 v2(46.66,30)
  BOTTOM w0.305: C468.2 53.35,28.36 53.35,29.33 X1.2 ; U58.J2 v2(49.06,25.2) ; 52.34,30.69 52.35,30.68
  BOTTOM w0.381: v1(30.47,42.27) 30.81,41.94 C450.2 ; C140.2 v1(34.15,34) ; C451.2 28.51,28.05 28.56,28.03 28.61,28 28.73,27.88 v1(29.37,27.88) ; R505.2 29.73,41.59 v1(29.46,41.86) ; 28.03,41.24 v1(27.99,41.27) ; C424.2 v1(34.46,21.96)
  BOTTOM w0.5: J28.S2 v1(38.85,3.51) ; R561.2 14.58,37.63 v1(14.56,37.65) ; v1(50.42,34.65) 50.44,34.67 50.44,36.29 C127.2 ; v2(45.39,15.52) 46.36,15.52 C202.2 ; C448.2 33.96,37.37 v2(33.96,39.3) ; v1(10.66,42.09) 10.66,41.59 R591.2 11.62,41.4 v1(11.62,42.09) ; v1(14.53,26.84) 14.53,27.74 C505.2 ; v1(27.99,41.27) 27.89,41.38 C134.2 ; C459.2 24.96,29.98 v1(24.77,30.18) ; v1(64.87,42.46) C169.2 C515.2 ; v1(8.34,8.69) 8.34,9.18 C516.2 7.38,9.22 v1(7.38,8.7) ; J27.S2 v1(46.35,3.51) ; J31.S2 v1(16.35,3.51) ; 52.35,30.68 51.55,30.68 v1(51.14,31.09) ; C452.2 52.34,30.69 ; v1(8.71,42.05) 8.71,41.46 C517.2 9.56,41.43 v1(9.56,42.08) ; v1(6.14,8.7) 6.14,9.28 R590.2 5.24,9.18 v1(5.24,8.72) ; R184.2 14.59,23.51 v1(14.59,24.46) ; C506.2 v2(33.76,27.19) ; C423.2 28.03,41.24 ; v1(32.01,29.16) 32.2,29.36 32.96,29.36 C152.2 ; C141.2 14.61,14.47 v1(14.61,13.57) ; C495.2 54.65,29.34 X1.2 ; J26.S2 v1(53.85,3.51) ; 21.26,1.55 v1(21.26,3.51) ; 28.76,1.55 v1(28.76,3.51) ; v2(60.04,22.84) v1(60.04,22.24) C492.2 v1(60.04,20.88) 60.04,20.87 C491.2 ; 58.76,1.55 v1(58.76,3.51) ; 43.76,1.55 v1(43.76,3.51) ; U53.4 47.5,41.57 v1(47.52,41.59) ; 36.26,1.55 v1(36.26,3.51) ; C463.2 v2(29.91,17.87) ; J30.S2 v1(23.85,3.51) ; 51.26,1.55 v1(51.26,3.51) ; U57.3 v1(11.87,19) ; U64.3 v1(11.87,32.25) ; J29.S2 v1(31.35,3.51) ; v1(21.01,36.85) R518.2 ; C150.2 v1(64.87,38.3)
  vias: v1(0.78,10.86) v1(0.78,8.36) v1(0.78,5.86) v1(6.83,0.78) v1(7.05,43.22) v1(9.33,0.78) v1(9.55,43.22) v1(11.83,0.78) v1(12.05,43.22) v1(12.89,12.29) v1(13.21,25.11) v1(13.19,23.31) v1(13.36,39.85) v1(13.41,41.5) v1(14.33,0.78) v1(14.43,8.25) v1(14.43,5.62) v1(14.55,43.22) v1(15.99,27.82) v1(16.02,23.76) v1(16.01,12.26) v1(16.14,5.04) v1(16.89,22.86) v1(17.05,43.22) v1(17.01,28.54) v1(17.01,26.82) v1(16.97,24.96) v1(17.79,20.7) v1(18.09,37.89) v1(18.07,36.15) v1(18.14,29.56) v1(18.09,23.91) v1(18.13,21.9) v1(18.16,27.75) v1(18.63,17.29) v1(19.04,34.7) v1(19.04,20.95) v1(19.06,37.01) v1(19.14,25.24) v1(19.13,23.11) v1(19.23,30.24) v1(19.17,28.62) v1(19.17,26.9) v1(19.33,0.78) v1(19.55,43.22) v1(20.41,41.54) v1(21.13,13.06) v1(21.22,23.15) v1(21.66,11.56) v1(21.63,5.26) v1(22.05,43.22) v1(22.69,12.89) v1(23.46,5.31) v1(24.47,11.71) v1(26.83,0.78) v1(29.26,5.25) v1(30.97,5.25) v1(31.64,10.95) v1(34.33,0.78) v1(36.16,11.07) v1(36.58,4.83) v1(37.56,11.63) v1(37.59,19.09) v1(38.54,4.8) v1(41.83,0.78) v1(43.24,11.76) v1(43.61,4.86) v1(46.79,4.91) v1(49.33,0.78) v1(50.89,4.89) v1(52.56,11.63) v1(54.17,4.92) v1(54.77,31.96) v1(54.77,31.27) v1(55.02,32.81) v1(55.46,31.96) v1(56.83,0.78) v1(57.47,38.54) v1(58.24,5.08) v1(59.56,37.29) v1(59.59,41.27) v1(59.58,40.45) v1(59.58,39.42) v1(59.58,38.31) v1(59.58,36.26) v1(59.64,11.63) v1(59.59,5.08) v1(61.83,0.78) v1(63.82,32.8) v1(63.84,31.74) v1(65.19,34.14) v1(65.94,33.95) v1(67.41,32.99) v1(67.41,32.4) v1(67.39,31.79) v1(68.23,40.77) v1(68.23,38.27) v1(68.23,35.77) v1(68.23,33.27) v1(68.23,30.77) v1(68.23,18.27) v1(68.23,15.77) v1(68.23,13.27) v1(68.23,10.77) v1(68.23,8.27) v1(68.23,5.77) v2(17.37,6.6) v2(18.81,7.8) v2(20.29,6.6) v2(21.89,24.45) v2(22.91,21.9) v2(24.87,6.6) v2(26.35,16.98) v2(26.31,7.8) v2(26.45,28.38) v2(26.4,27.1) v2(27.13,40.44) v2(27.16,29.97) v2(27.21,37.01) v2(27.21,35.81) v2(27.21,34.52) v2(27.22,33.39) v2(27.21,23.61) v2(27.21,22.32) v2(27.79,6.6) v2(28.37,37.01) v2(28.37,35.83) v2(28.37,34.54) v2(28.38,33.4) v2(28.37,23.62) v2(28.37,22.34) v2(28.38,21.2) v2(29.63,37.01) v2(29.63,35.81) v2(29.64,34.55) v2(29.63,33.4) v2(29.63,24.81) v2(29.63,23.61) v2(29.64,22.35) v2(29.63,21.2) v2(30.06,28.26) v2(30.81,37.01) v2(30.81,35.81) v2(30.81,34.52) v2(30.82,33.39) v2(30.81,24.81) v2(30.81,23.61) v2(30.82,21.19) v2(30.89,29.95) v2(31.01,28.21) v2(31.79,29.96) v2(31.96,28.12) v2(32.37,6.6) v2(32.78,16.99) v2(32.99,26.41) v2(33.81,16.94) v2(33.81,7.8) v2(34,24.66) v2(35.16,29.95) v2(35.29,6.6) v2(35.79,24.97) v2(39.87,6.6) v2(41.31,7.8) v2(42.66,22.8) v2(42.63,14.57) v2(42.79,6.6) v2(47.37,6.6) v2(47.46,23.6) v2(47.46,22.8) v2(48.81,7.8) v2(50.29,6.6) v2(54.55,21.6) v2(54.55,20.33) v2(54.87,6.6) v2(55.11,29.64) v2(56.31,7.8) v2(57.79,6.6)
